# Altium PCB FRONT.PcbDoc (part 1 of 5)
Units mm, origin at the board's own origin, x right, y up, seen from the top; angles counter-clockwise.
Board outline 100 x 68 mm, 4 copper layers (Top Layer, Layer 1, Layer 2, Bottom Layer), stack 1.484 mm thick; 322 components, 276 nets, 1438 pads, 1119 vias.
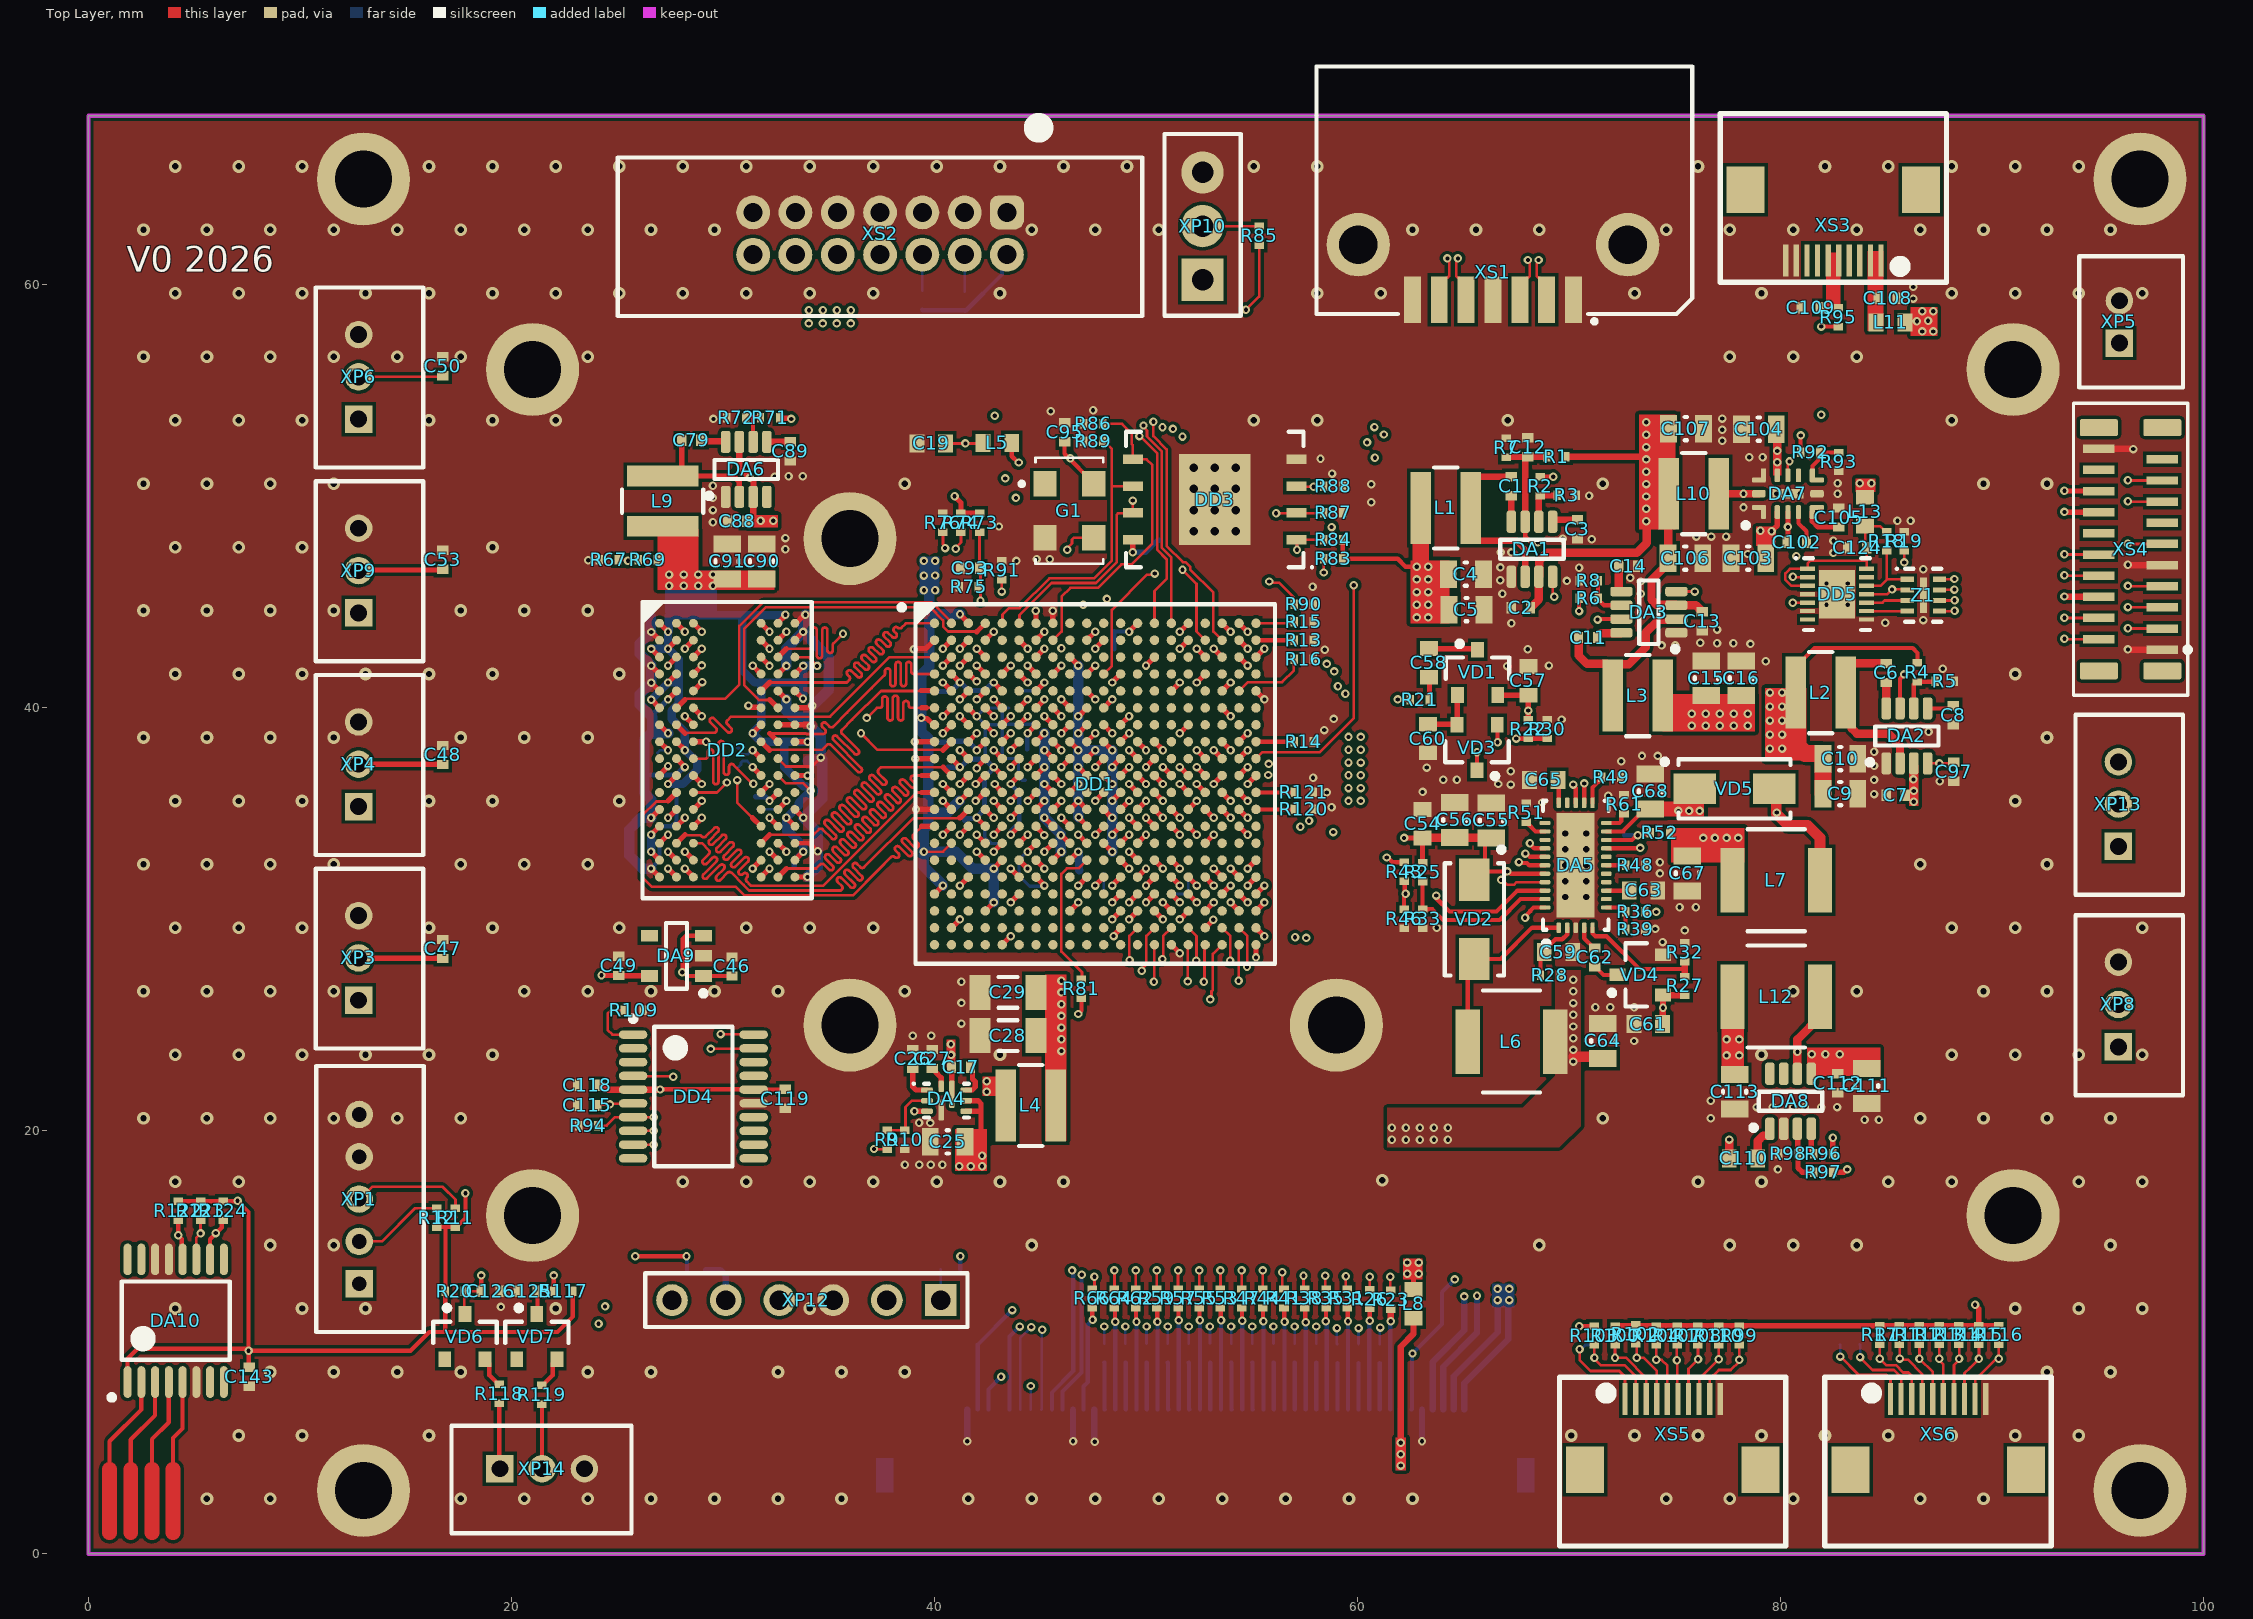
[diagram p0: Top Layer view]
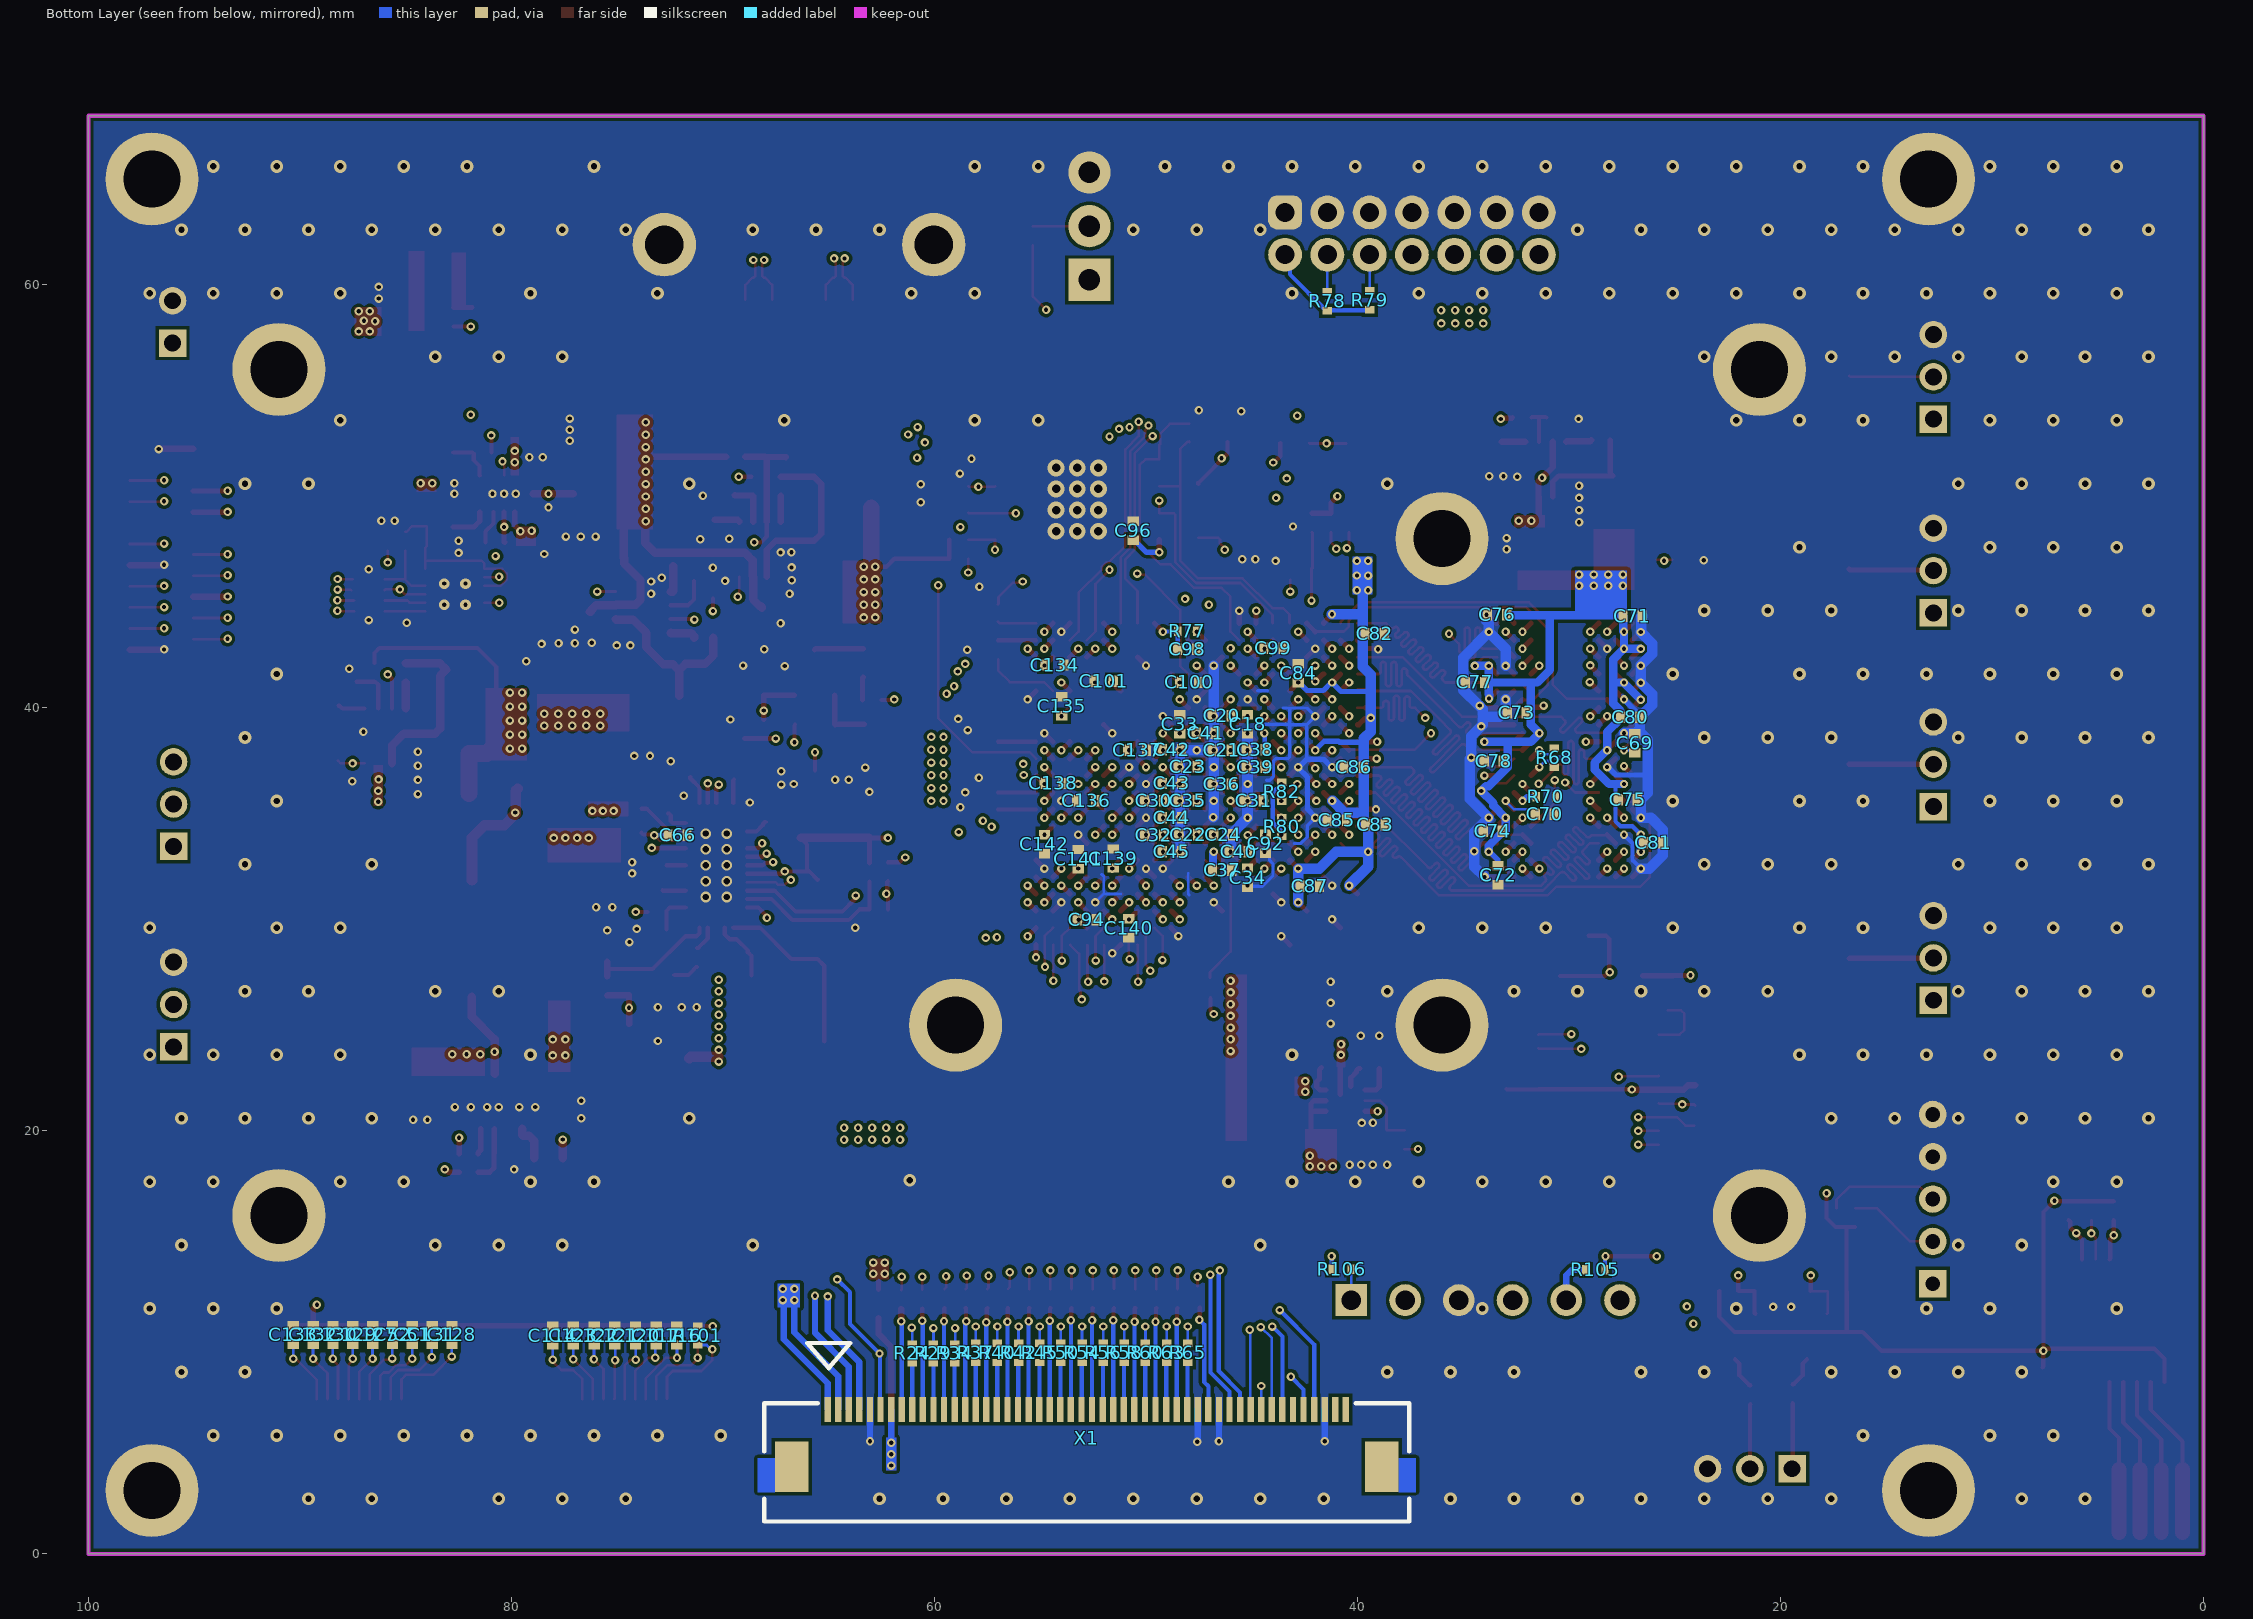
[diagram p1: Bottom Layer view, seen from below]
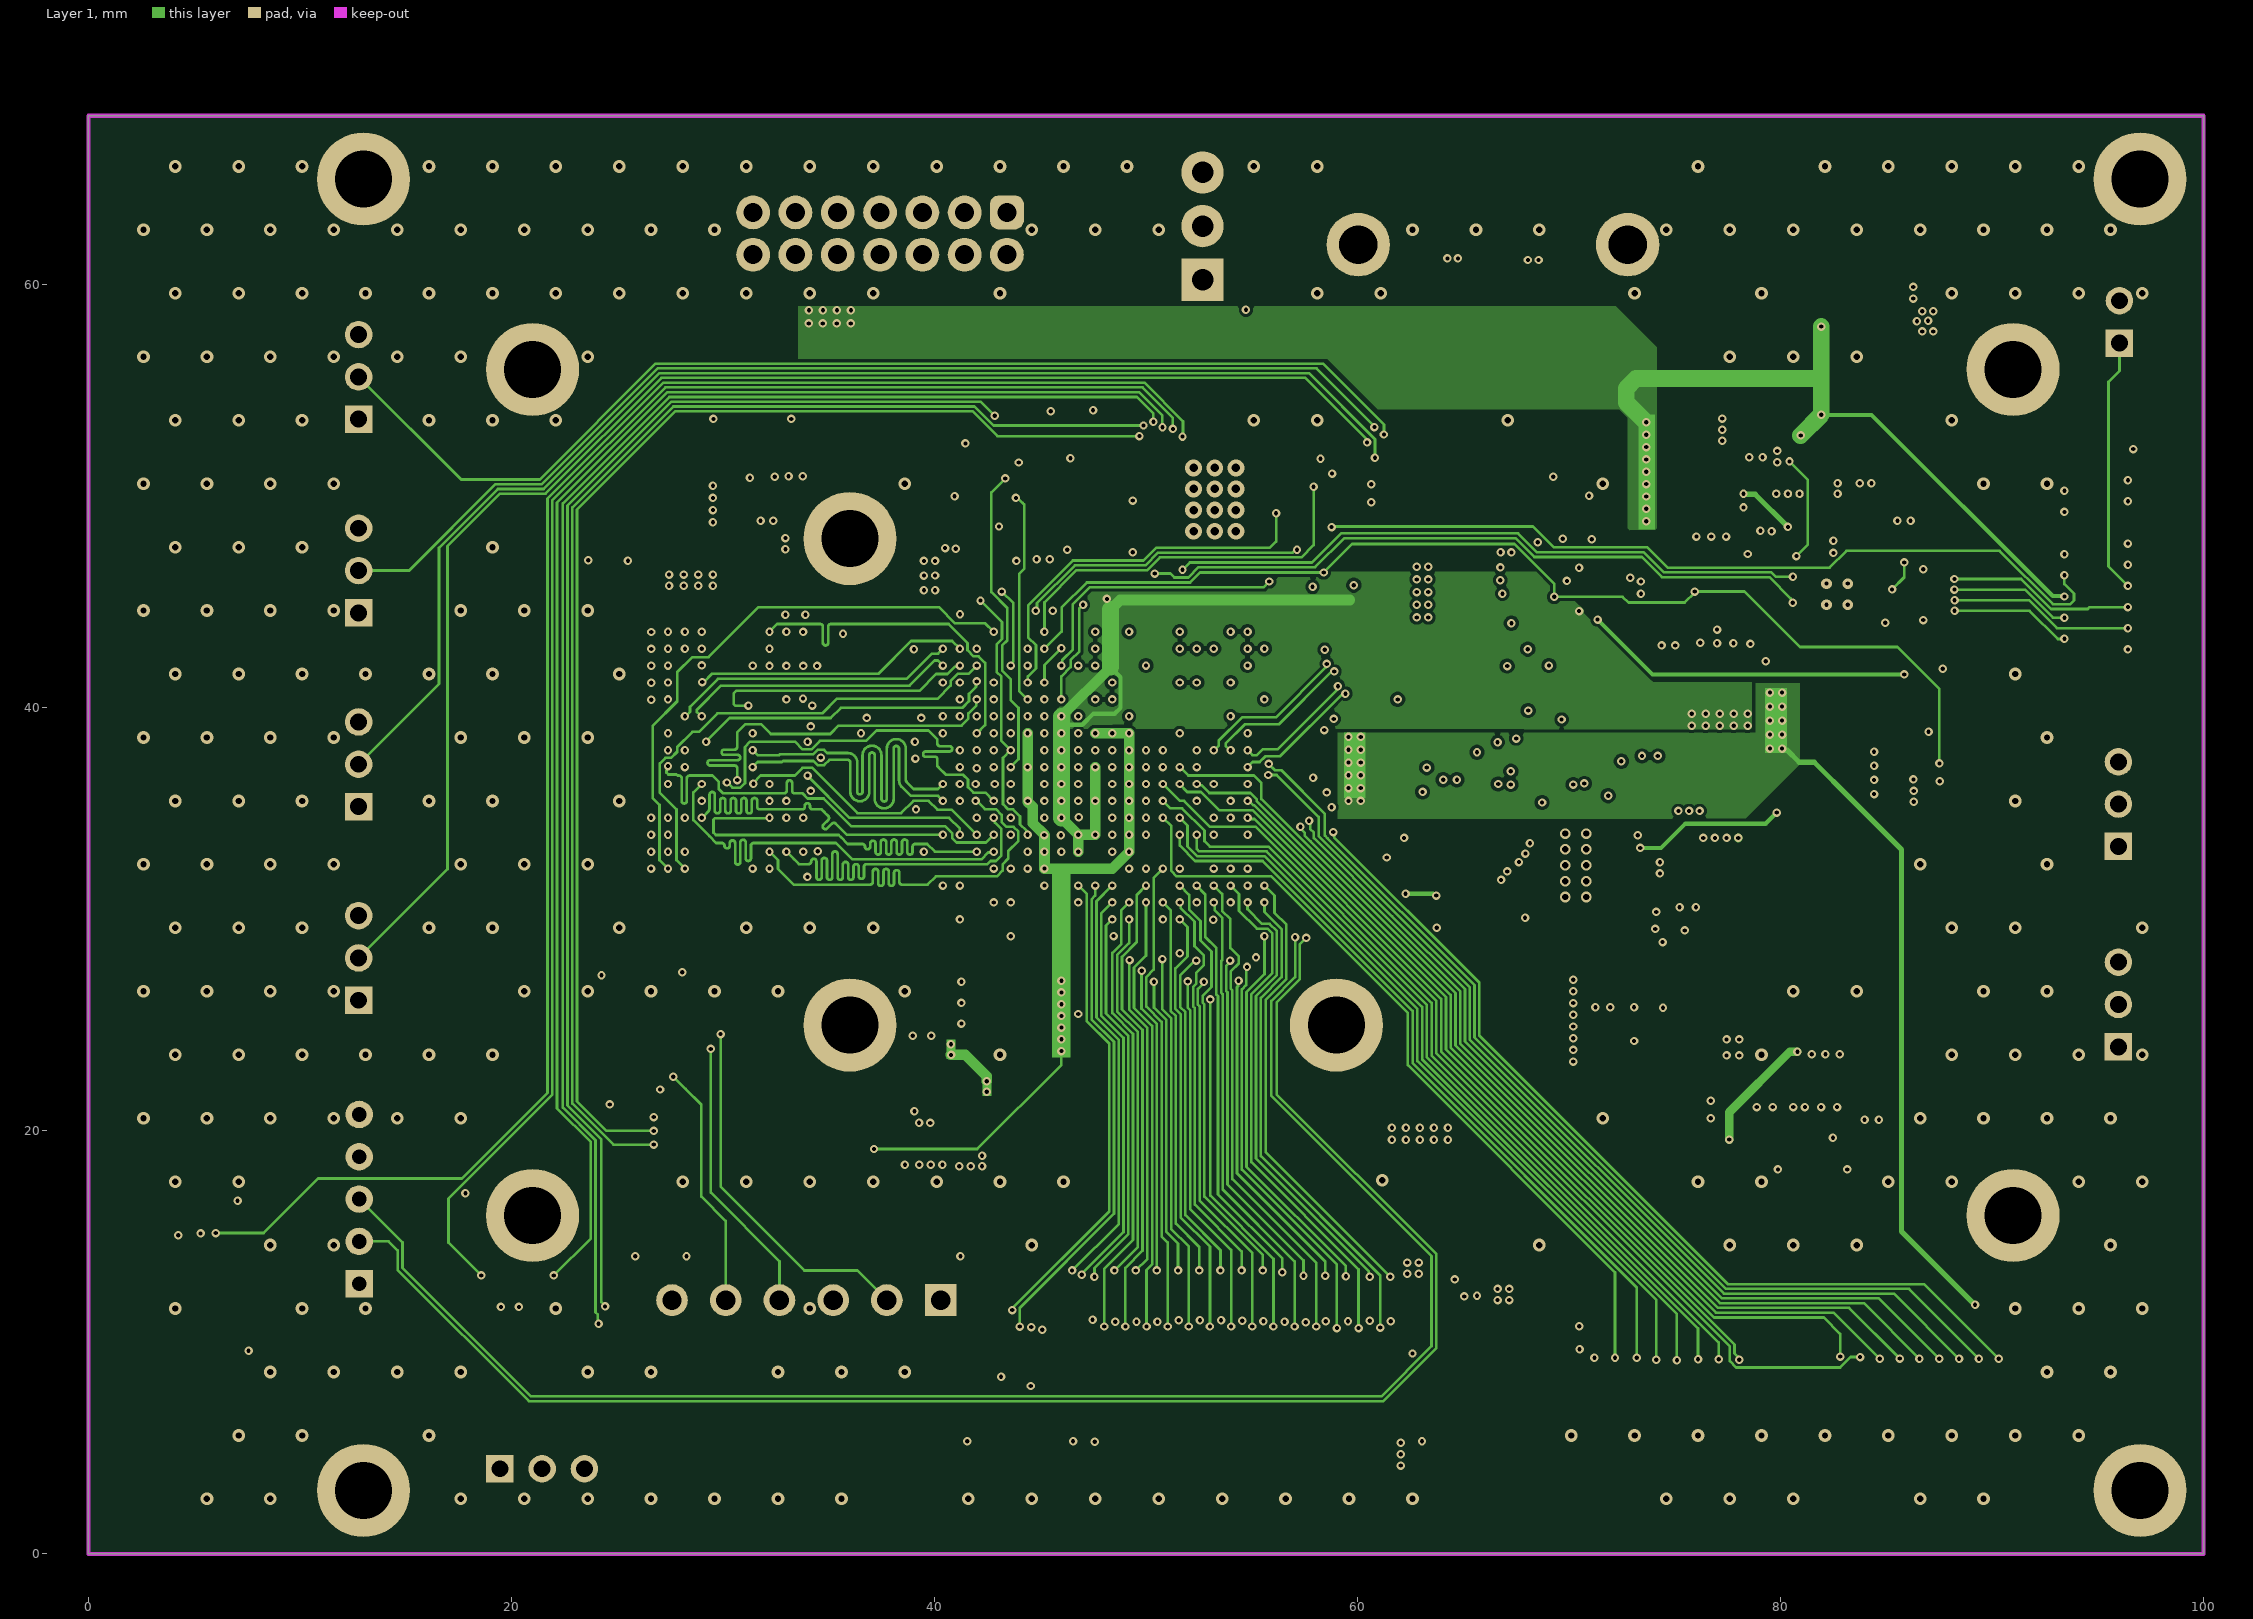
[diagram p2: Layer 1]
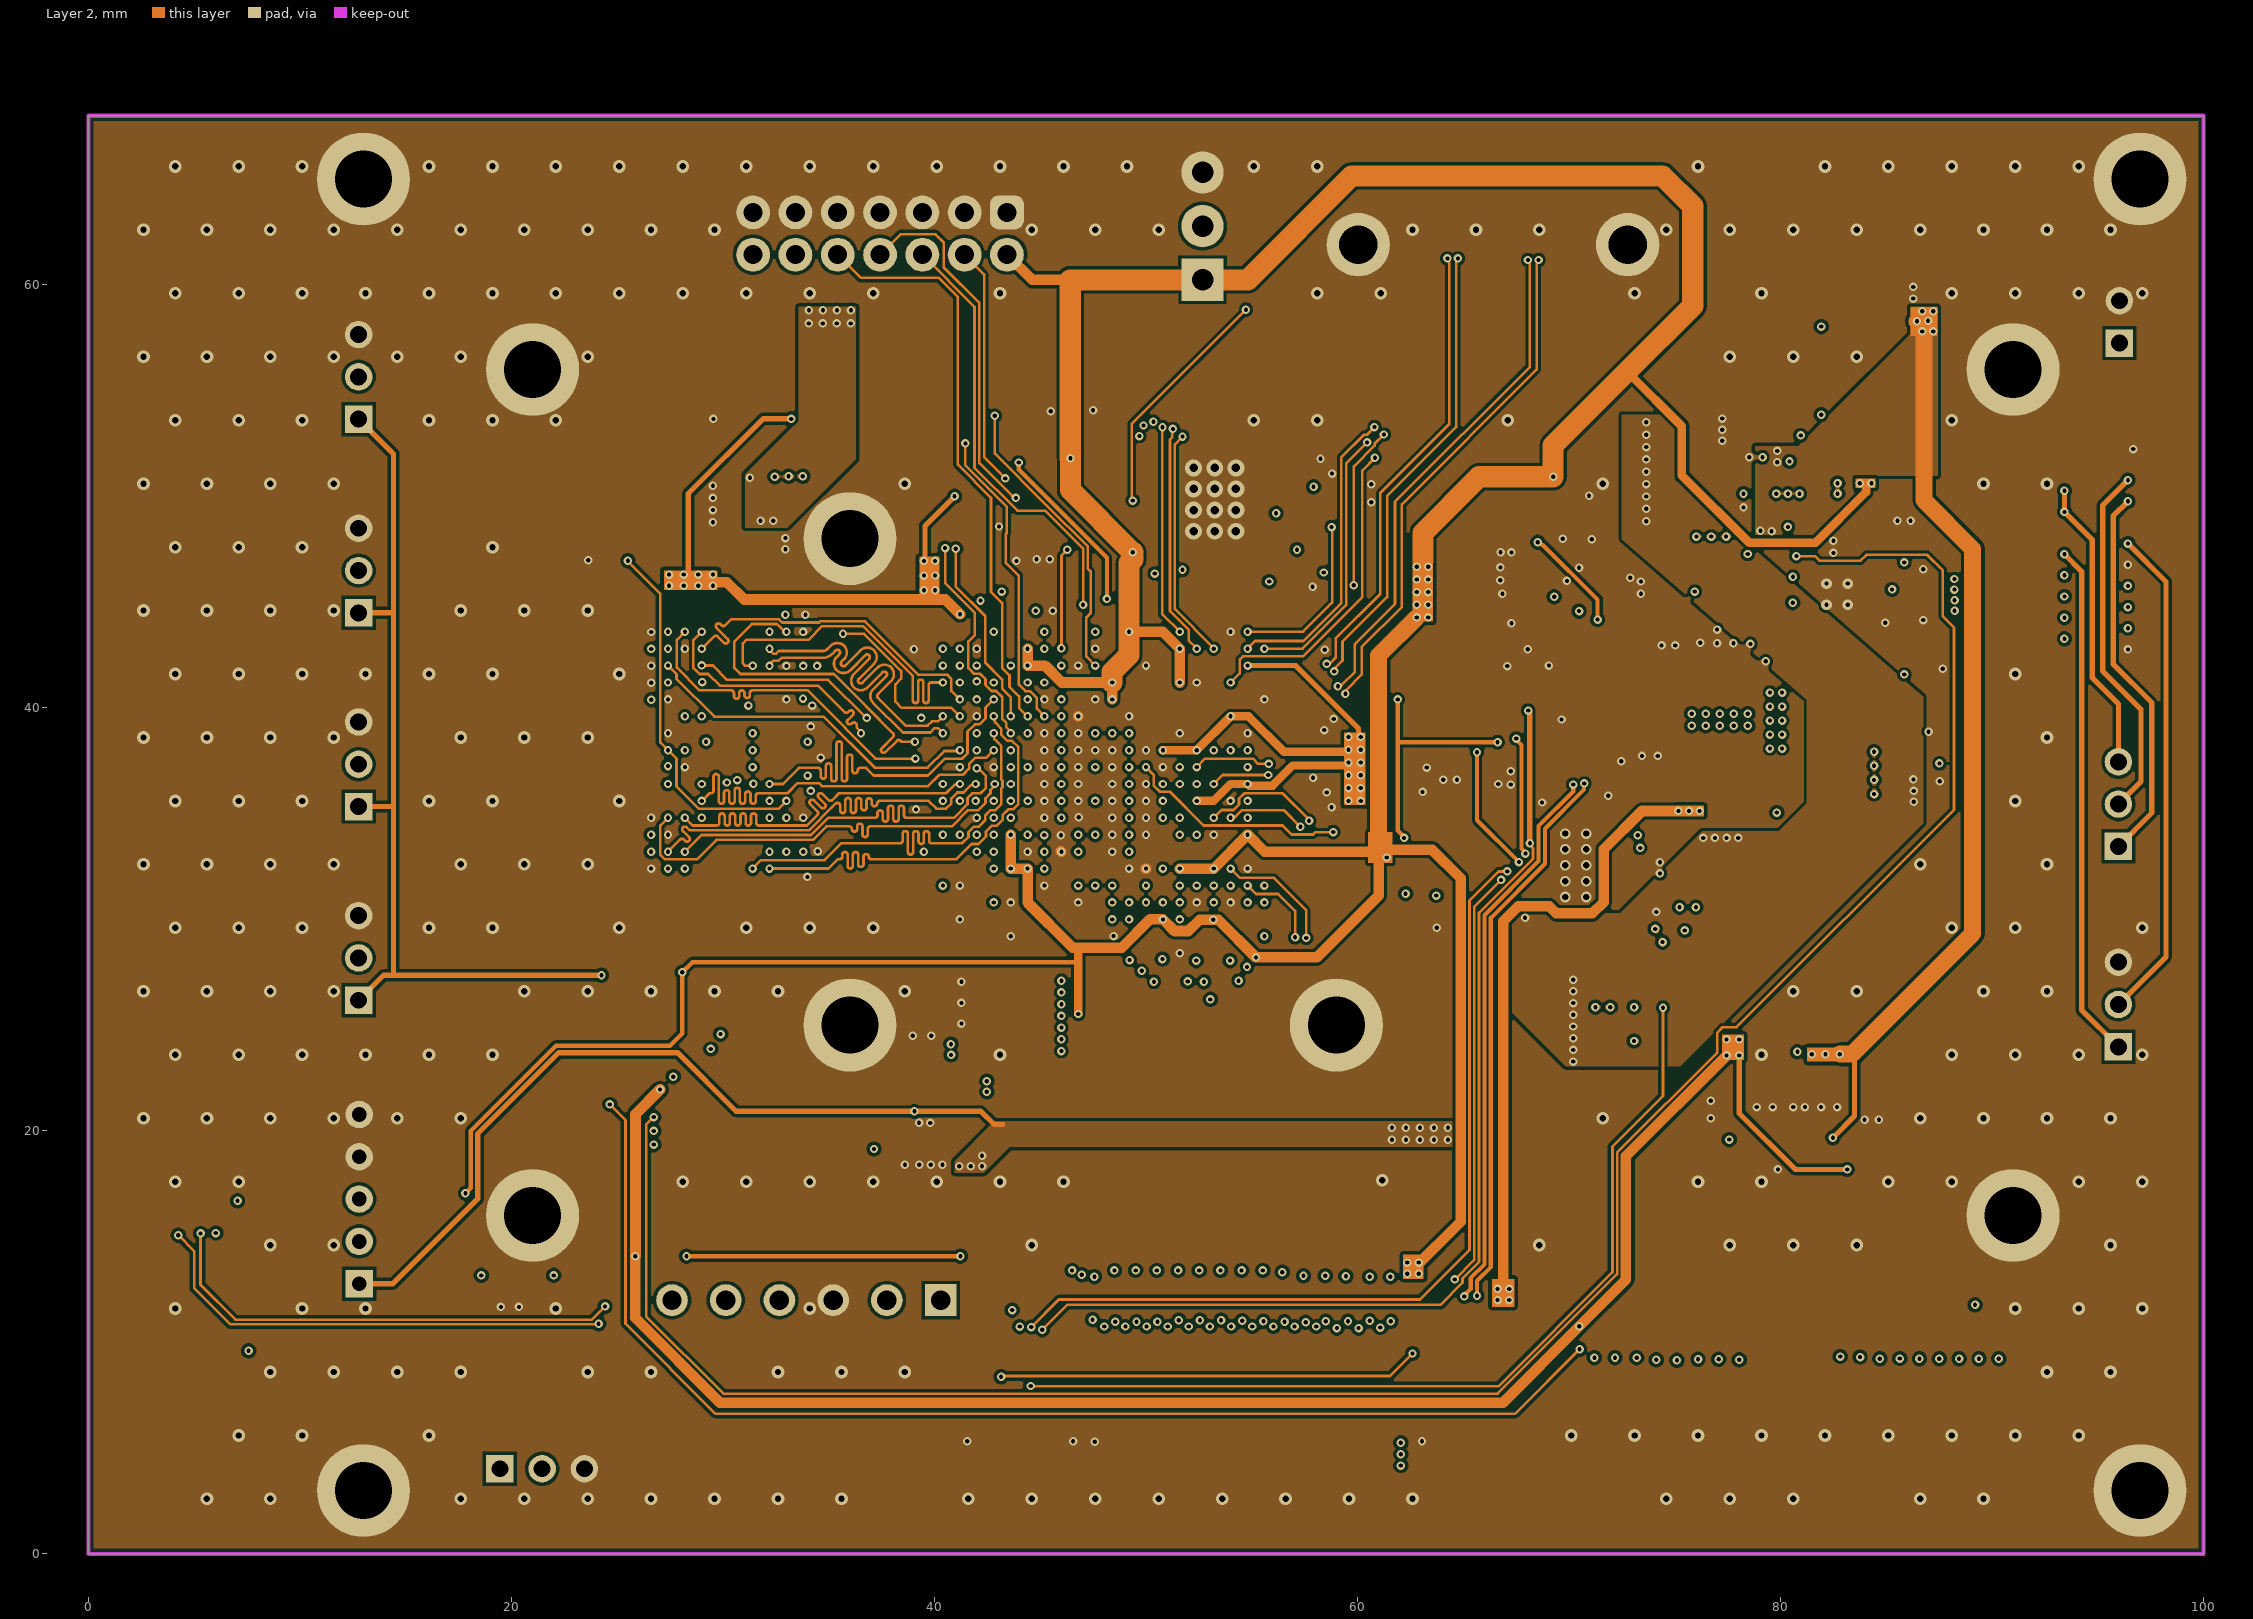
[diagram p3: Layer 2]

## Layer stack, top to bottom
Top Solder: solder mask 0.0102, Solder Resist, Dk 3.5
Top Layer: signal copper 0.0356
Dielectric 2: prepreg 0.0965, PP-013, Dk 4.3
Dielectric 4: core 0.5334, Core-037, Dk 4.8
Layer 1: signal copper 0.018
Dielectric 1: prepreg 0.1168, PP-016, Dk 4.4
Layer 2: signal copper 0.018
Dielectric 5: core 0.5334, Core-037, Dk 4.8
Dielectric 3: prepreg 0.0965, PP-013, Dk 4.3
Bottom Layer: signal copper 0.0356
Bottom Solder: solder mask 0.0102, Solder Resist, Dk 3.5

## Board outline
0,0 100,0 100,68 0,68

## Design rules (kind name [scope] priority, off if disabled: settings)
Clearance [All] p1: gap=0.1 ignorepadtopadclearanceinfootprint=FALSE except(0.15: Arc-Fill Arc-Poly Arc-Region Track-Fill Track-Poly Track-Region SMDPad-Fill SMDPad-Poly SMDPad-Region THPad-Fill THPad-Poly THPad-Region Via-Fill Via-Poly Via-Region Fill-Fill Fill-Poly Fill-Region Poly-Poly Poly-Region Region-Region)
DiffPairsRouting [All] p1: maxlimit=0.254 minlimit=0.2 mostfreqgap=0.2 toplayer_minwidth=0.125 toplayer_maxwidth=0.5 toplayer_prefwidth=0.2 midlayer2_minwidth=0.125 midlayer2_maxwidth=0.5 midlayer2_prefwidth=0.2 midlayer3_minwidth=0.125 midlayer3_maxwidth=0.5 midlayer3_prefwidth=0.2 bottomlayer_minwidth=0.125 bottomlayer_maxwidth=0.5 bottomlayer_prefwidth=0.2 maxuncoupledlength=12.7
HoleSize [All] p1: absolutevalues=TRUE maxlimit=5 minlimit=0.2 maxpercent=80.000 minpercent=20.000
HoleToHoleClearance [All] p1: gap=0.3 allowstackedmicrovias=TRUE
MatchedLengths MatchedLengths_DDR_CLOCKS_STROBES_2 [InxSignalClass('ADDR_PP1') OR InxSignalClass('DATA_BL0') OR InxSignalClass('DATA_BL1')] p1: tolerance=0 checknetsindiffpair=TRUE checkdiffpairvsdiffpair=FALSE checkxsignals=FALSE checkothers=FALSE
MatchedLengths MatchedLengths_DATA_BL1 [InxSignalClass('DATA_BL1')] p2: tolerance=0 checknetsindiffpair=FALSE checkdiffpairvsdiffpair=TRUE checkxsignals=TRUE checkothers=TRUE
MatchedLengths MatchedLengths_DATA_BL0_1 [InxSignalClass('DATA_BL0')] p3: tolerance=0 checknetsindiffpair=FALSE checkdiffpairvsdiffpair=TRUE checkxsignals=TRUE checkothers=TRUE
MatchedLengths MatchedLengths_ADDR_PP1_1 [InxSignalClass('ADDR_PP1')] p4: tolerance=0 checknetsindiffpair=FALSE checkdiffpairvsdiffpair=TRUE checkxsignals=TRUE checkothers=TRUE
MatchedLengths MatchedLengths_DDR_CLOCKS_STROBES_1 [All] p5: tolerance=0 checknetsindiffpair=TRUE checkdiffpairvsdiffpair=FALSE checkxsignals=FALSE checkothers=FALSE
MatchedLengths MatchedLengths_DDR_CLOCKS_STROBES [InxSignalClass('ADDR_PP1') OR InxSignalClass('DATA_BL0')] p6: tolerance=3 checknetsindiffpair=TRUE checkdiffpairvsdiffpair=FALSE checkxsignals=FALSE checkothers=FALSE
MatchedLengths MatchedLengths_DATA_BL0 [InxSignalClass('DATA_BL0')] p7: tolerance=3 checknetsindiffpair=FALSE checkdiffpairvsdiffpair=TRUE checkxsignals=TRUE checkothers=TRUE targetsourcename=DDR_D6_BL0
MatchedLengths MatchedLengths_ADDR_PP1 [InxSignalClass('ADDR_PP1')] p8: tolerance=3 checknetsindiffpair=FALSE checkdiffpairvsdiffpair=TRUE checkxsignals=TRUE checkothers=TRUE
MinimumSolderMaskSliver [All] p1: minsoldermaskwidth=0.125
PolygonConnect [All] p1: connectstyle=Direct reliefconductorwidth=0.254 reliefentries=4 polygonreliefangle="90 Angle" airgapwidth=0.254
RoutingTopology RoutingTopology_DDRAddressAndControls [InNetClass('DDR_AddressAndControls')] p1: topology=Daisy_Simple
RoutingTopology [All] p2: topology=Shortest
RoutingVias [All] p1: holewidth=0.4 width=0.7 viastyle="Through Hole" minholewidth=0.2 minwidth=0.4 maxholewidth=5 maxwidth=10
SolderMaskExpansion [All] p1: expansion=0.102 istentingtop=FALSE
SupplyNets "Schematic Supply Nets_15" [InNet('TCH_IRQ')] p1: voltage=0.000
SupplyNets "Schematic Supply Nets_13" [InNet('I2C_SCL')] p2: voltage=0.000
SupplyNets "Schematic Supply Nets_12" [InNet('I2C_SDA')] p3: voltage=0.000
SupplyNets "Schematic Supply Nets_11" [InNet('ADC_BAND0N')] p4: voltage=0.000
SupplyNets "Schematic Supply Nets_10" [InNet('ADC_BAND1N')] p5: voltage=0.000
SupplyNets "Schematic Supply Nets_2" [InNet('MCU_GP0')] p6: voltage=0.000
SupplyNets "Schematic Supply Nets_1" [InNet('MCU_GP1')] p7: voltage=0.000
SupplyNets "Schematic Supply Nets" [InNet('CW_DOT')] p8: voltage=0.000
SupplyNets "Schematic Supply Nets_9" [InNet('CW_DASH')] p9: voltage=0.000
SupplyNets "Schematic Supply Nets_7" [InNet('CW_KEY')] p10: voltage=0.000
SupplyNets "Schematic Supply Nets_6" [InNet('RS422TX')] p11: voltage=0.000
SupplyNets "Schematic Supply Nets_4" [InNet('RS422RX')] p12: voltage=0.000
SupplyNets "Schematic Supply Nets_120" [InNet('VDD_1V25')] p13: voltage=0.000
SupplyNets "Schematic Supply Nets_119" [InNet('BL_K2')] p14: voltage=0.000
SupplyNets "Schematic Supply Nets_118" [InNet('LCD_AVDD')] p15: voltage=0.000
SupplyNets "Schematic Supply Nets_117" [InNet('DDR_1V35')] p16: voltage=0.000
SupplyNets "Schematic Supply Nets_116" [InNet('LCD_OPI')] p17: voltage=0.000
SupplyNets "Schematic Supply Nets_115" [InNet('PWR_KEY0')] p18: voltage=0.000
SupplyNets "Schematic Supply Nets_114" [InNet('LCD_DVDD')] p19: voltage=0.000
SupplyNets "Schematic Supply Nets_112" [InNet('MCU_3V3')] p20: voltage=0.000
SupplyNets "Schematic Supply Nets_111" [InNet('LCD_VGH')] p21: voltage=0.000
SupplyNets "Schematic Supply Nets_110" [InNet('BL_PWR')] p22: voltage=0.000
SupplyNets "Schematic Supply Nets_109" [InNet('ADC2_N')] p23: voltage=0.000
SupplyNets "Schematic Supply Nets_108" [InNet('ADC1_N')] p24: voltage=0.000
SupplyNets "Schematic Supply Nets_107" [InNet('BL_K1')] p25: voltage=0.000
SupplyNets "Schematic Supply Nets_106" [InNet('LCD_VCOM')] p26: voltage=0.000
SupplyNets "Schematic Supply Nets_105" [InNet('BL_A')] p27: voltage=0.000
SupplyNets "Schematic Supply Nets_104" [InNet('ADC0_N')] p28: voltage=0.000
SupplyNets "Schematic Supply Nets_103" [InNet('PWR_KEY1')] p29: voltage=0.000
SupplyNets "Schematic Supply Nets_102" [InNet('ADC3_N')] p30: voltage=0.000
SupplyNets "Schematic Supply Nets_101" [InNet('LCD_VGL')] p31: voltage=0.000
SupplyNets "Schematic Supply Nets_100" [InNet('POR_B')] p32: voltage=0.000
SupplyNets "Schematic Supply Nets_98" [InNet('LCD_DCTRL')] p33: voltage=0.000
SupplyNets "Schematic Supply Nets_53" [InNet('LCD_EN')] p34: voltage=0.000
SupplyNets "Schematic Supply Nets_79" [InNet('MIO2')] p35: voltage=0.000
SupplyNets "Schematic Supply Nets_74" [InNet('PWR_EN')] p36: voltage=0.000
SupplyNets "Schematic Supply Nets_64" [InNet('VDD_2V5')] p37: voltage=0.000
SupplyNets "Schematic Supply Nets_63" [InNet('GND')] p38: voltage=0.000
SupplyNets "Schematic Supply Nets_43" [InNet('VMODE0')] p39: voltage=0.000
SupplyNets "Schematic Supply Nets_42" [InNet('MIO5')] p40: voltage=0.000
SupplyNets "Schematic Supply Nets_36" [InNet('MIO3')] p41: voltage=0.000
SupplyNets "Schematic Supply Nets_34" [InNet('MIO4')] p42: voltage=0.000
SupplyNets "Schematic Supply Nets_20" [InNet('MIO6')] p43: voltage=0.000
SupplyNets "Schematic Supply Nets_14" [InNet('VDD_3V3')] p44: voltage=0.000
SupplyNets "Schematic Supply Nets_8" [InNet('VDD_1V0')] p45: voltage=0.000
SupplyNets "Schematic Supply Nets_5" [InNet('VDD_1V8')] p46: voltage=0.000
SupplyNets "Schematic Supply Nets_3" [InNet('VMODE1')] p47: voltage=0.000
Width [All] p1: maxlimit=5 minlimit=0.125 preferedwidth=0.2 minimp=50.000000 maximp=50.000000 favimp=50.000000
25 further rules are at their usual default settings.

## Classes and differential pairs
component class FRONT_INTF: C46 C49 C51 C52 C114 C116 C117 C120 C121 C122 C123 C124 C125 C126 C127 C128 C129 C130 C131 C132 C133 DA9 DD5 L13 R17 R18 R19 R20 R99 R100 R102 R104 R107 R108 R110 R111 R112 R113 R114 R115 R116 R117 R118 R119 VD6 VD7 XP5 XP8 XP13 XP14 XS4 XS5 XS6 Z1
component class FRONT_PWR: C1 C2 C3 C4 C5 C6 C7 C8 C9 C10 C11 C12 C13 C14 C15 C16 C17 C18 C19 C20 C21 C22 C23 C24 C25 C26 C27 C28 C29 C30 C31 C32 C33 C34 C35 C36 C37 C38 C39 C40 C41 C42 C43 C44 C45 DA1 DA2 DA3 DA4 L1 L2 L3 L4 L5 R1 R2 R3 R4 R5 R6 R7 R8 R9 R10
component class FRONT_PS: C94 C95 C96 C97 C98 C99 C100 C101 C143 DA10 DD1 DD3 G1 R77 R78 R79 R80 R81 R82 R83 R84 R85 R86 R87 R88 R89 R90 R91 R122 R123 R124 XP10 XS2
component class FRONT_PL: C47 C48 C50 C53 C134 C135 C136 C137 C138 C139 C140 C141 C142 R11 R12 R13 R14 R15 R16 R120 R121 XP1 XP3 XP4 XP6 XP9 XS1
component class FRONT_MCU: C102 C103 C104 C105 C106 C107 C108 C109 C110 C111 C112 C113 C115 C118 C119 DA7 DA8 DD4 L10 L11 L12 R92 R93 R94 R95 R96 R97 R98 R101 R103 R105 R106 R109 XP12 XS3
component class FRONT_LCD: C54 C55 C56 C57 C58 C59 C60 C61 C62 C63 C64 C65 C66 C67 C68 DA5 L6 L7 L8 R21 R22 R23 R24 R25 R26 R27 R28 R29 R30 R31 R32 R33 R34 R35 R36 R37 R38 R39 R40 R41 R42 R43 R44 R45 R46 R47 R48 R49 R50 R51 R52 R53 R54 R55 R56 R57 R58 R59 R60 R61 R62 R63 R64 R65 R66 VD1 VD2 VD3 VD4 VD5 X1
component class FRONT_DDR: C69 C70 C71 C72 C73 C74 C75 C76 C77 C78 C79 C80 C81 C82 C83 C84 C85 C86 C87 C88 C89 C90 C91 C92 C93 DA6 DD2 L9 R67 R68 R69 R70 R71 R72 R73 R74 R75 R76
differential pair MIC: +MIC_P -MIC_N
differential pair DDR_DQS1: +DDR_DQS1_P -DDR_DQS1_N
differential pair DDR_DQS0: +DDR_DQS0_P -DDR_DQS0_N
differential pair DDR_CK: +DDR_CK_P -DDR_CK_N
differential pair SERDATA: +SERDATA_P -SERDATA_N
differential pair SERCLK: +SERCLK_P -SERCLK_N

## Components (designator, comment, footprint, x,y, rotation, side; value= is the part's Value field where it differs from the comment)
C1 "CC0402KRX5R6BB104" CAPC1005X05L 67.275,50.475 r90 top value="0402 0,1 мкФ 10В X7R"
C2 "CC0402KRX5R6BB104" CAPC1005X05L 67.725,44.725 r0 top value="0402 0,1 мкФ 10В X7R"
C3 "CC0402KRX7R9BB822" CAPC1005X05L 70.4,48.45 r90 top value="0402 8,2 нФ 50В X7R"
C4 "CC0805MKX5R5BB226" CAPC2012X09L 65.125,46.325 r180 top value="0805 22 мкФ 6,3В X5R"
C5 "CC0805MKX5R5BB226" CAPC2012X09L 65.15,44.65 r180 top value="0805 22 мкФ 6,3В X5R"
C6 "CC0402KRX5R6BB104" CAPC1005X05L 85,41.65 r90 top value="0402 0,1 мкФ 10В X7R"
C7 "CC0402KRX5R6BB104" CAPC1005X05L 85.45,35.875 r0 top value="0402 0,1 мкФ 10В X7R"
C8 "CC0402KRX7R9BB822" CAPC1005X05L 88.175,39.65 r90 top value="0402 8,2 нФ 50В X7R"
C9 "CC0805MKX5R5BB226" CAPC2012X09L 82.825,35.95 r180 top value="0805 22 мкФ 6,3В X5R"
C10 "CC0805MKX5R5BB226" CAPC2012X09L 82.825,37.6 r180 top value="0805 22 мкФ 6,3В X5R"
C11 "CC0402KRX5R6BB104" CAPC1005X05L 70.9,43.325 r180 top value="0402 0,1 мкФ 10В X7R"
C12 "CC0402KRX5R6BB104" CAPC1005X05L 68.05,52.325 r270 top value="0402 0,1 мкФ 10В X7R"
C13 "CC0402KRX5R6BB104" CAPC1005X05L 76.3,44.1 r90 top value="0402 0,1 мкФ 10В X7R"
C14 "CC0402KRX7R9BB822" CAPC1005X05L 72.8,46.7 r180 top value="0402 8,2 нФ 50В X7R"
C15 "CC0805MKX5R5BB226" CAPC2012X09L 76.5,41.4 r270 top value="0805 22 мкФ 6,3В X5R"
C16 "CC0805MKX5R5BB226" CAPC2012X09L 78.15,41.4 r270 top value="0805 22 мкФ 6,3В X5R"
C17 "CC0402KRX5R6BB104" CAPC1005X05L 41.25,23 r180 top value="0402 0,1 мкФ 10В X7R"
C18 "CC0402KRX5R6BB104" CAPC1005X05L 45.2,39.225 r270 bottom value="0402 0,1 мкФ 10В X7R"
C19 "CC0603KRX5R6BB475" CAPC1608X08L 39.85,52.5 r0 top value="0603 4,7 мкФ 10В X5R"
C20 "CC0402KRX5R6BB104" CAPC1005X05L 46.425,39.625 r0 bottom value="0402 0,1 мкФ 10В X7R"
C21 "CC0402KRX5R6BB104" CAPC1005X05L 46.425,38 r0 bottom value="0402 0,1 мкФ 10В X7R"
C22 "CC0402KRX5R6BB104" CAPC1005X05L 48,34 r0 bottom value="0402 0,1 мкФ 10В X7R"
C23 "CC0402KRX5R6BB104" CAPC1005X05L 48.025,37.225 r0 bottom value="0402 0,1 мкФ 10В X7R"
C24 "CC0402KRX5R6BB104" CAPC1005X05L 46.35,34 r180 bottom value="0402 0,1 мкФ 10В X7R"
C25 "CC0805KKX5R8BB106" CAPC2012X09L 40.625,19.475 r0 top value="0805 10 мкФ 25В X7R"
C26 "CC0402KRX5R5BB105" CAPC1005X05L 38.975,23.4 r270 top value="0402 1 мкФ 6,3В X5R"
C27 "CC0402KRX7R9BB103" CAPC1005X05L 39.9,23.4 r270 top value="0402 10 нФ 50В X7R"
C28 "CC1206MKX5R5BB107" CAPC3216X12L 43.475,24.5 r0 top value="1206 100 мкФ 6,3В X5R"
C29 "CC1206MKX5R5BB107" CAPC3216X12L 43.475,26.55 r0 top value="1206 100 мкФ 6,3В X5R"
C30 "CC0402KRX5R6BB104" CAPC1005X05L 49.625,35.6 r0 bottom value="0402 0,1 мкФ 10В X7R"
C31 "CC0402KRX5R6BB104" CAPC1005X05L 44.9,35.6 r0 bottom value="0402 0,1 мкФ 10В X7R"
C32 "CC0402KRX5R6BB104" CAPC1005X05L 49.625,33.975 r0 bottom value="0402 0,1 мкФ 10В X7R"
C33 "CC0402KRX5R6BB104" CAPC1005X05L 48.4,39.225 r90 bottom value="0402 0,1 мкФ 10В X7R"
C34 "CC0402KRX5R6BB104" CAPC1005X05L 45.2,31.975 r270 bottom value="0402 0,1 мкФ 10В X7R"
C35 "CC0402KRX5R6BB104" CAPC1005X05L 48.025,35.6 r0 bottom value="0402 0,1 мкФ 10В X7R"
C36 "CC0402KRX5R6BB104" CAPC1005X05L 46.425,36.4 r0 bottom value="0402 0,1 мкФ 10В X7R"
C37 "CC0402KRX5R6BB104" CAPC1005X05L 46.402,32.33 r180 bottom value="0402 0,1 мкФ 10В X7R"
C38 "CC0402KRX5R6BB104" CAPC1005X05L 44.825,38.025 r0 bottom value="0402 0,1 мкФ 10В X7R"
C39 "CC0402KRX5R6BB104" CAPC1005X05L 44.825,37.2 r0 bottom value="0402 0,1 мкФ 10В X7R"
C40 "CC0402KRX5R6BB104" CAPC1005X05L 45.625,33.2 r0 bottom value="0402 0,1 мкФ 10В X7R"
C41 "CC0402KRX5R6BB104" CAPC1005X05L 47.175,38.8 r180 bottom value="0402 0,1 мкФ 10В X7R"
C42 "CC0402KRX5R6BB104" CAPC1005X05L 48.775,38.025 r180 bottom value="0402 0,1 мкФ 10В X7R"
C43 "CC0402KRX5R6BB104" CAPC1005X05L 48.775,36.425 r180 bottom value="0402 0,1 мкФ 10В X7R"
C44 "CC0402KRX5R6BB104" CAPC1005X05L 48.775,34.8 r180 bottom value="0402 0,1 мкФ 10В X7R"
C45 "CC0402KRX5R6BB104" CAPC1005X05L 48.775,33.2 r180 bottom value="0402 0,1 мкФ 10В X7R"
C46 "CC0402KRX5R6BB104" CAPC1005X05L 30.425,27.775 r270 top value="0402 0,1 мкФ 10В X7R"
C47 "CC0402KRX5R6BB104" CAPC1005X05L 16.75,28.6 r270 top value="0402 0,1 мкФ 10В X7R"
C48 "CC0402KRX5R6BB104" CAPC1005X05L 16.75,37.775 r270 top value="0402 0,1 мкФ 10В X7R"
C49 "CC0402KRX5R6BB104" CAPC1005X05L 25.075,27.8 r270 top value="0402 0,1 мкФ 10В X7R"
C50 "CC0402KRX5R6BB104" CAPC1005X05L 16.75,56.15 r270 top value="0402 0,1 мкФ 10В X7R"
C51 "CC0402KRX5R6BB104" CAPC1005X05L 84.688,10.35 r90 bottom value="0402 0,1 мкФ 10В X7R"
C52 "CC0402KRX5R6BB104" CAPC1005X05L 85.625,10.35 r90 bottom value="0402 0,1 мкФ 10В X7R"
C53 "CC0402KRX5R6BB104" CAPC1005X05L 16.75,47 r270 top value="0402 0,1 мкФ 10В X7R"
C54 "CC0603KRX7R9BB105" CAPC1608X08L 63.075,34.525 r270 top value="0603 1 мкФ 50В X7R"
C55 "CC0805KKX5R8BB106" CAPC2012X09L 66.325,34.675 r90 top value="0805 10 мкФ 25В X7R"
C56 "CC0805KKX5R8BB106" CAPC2012X09L 64.6,34.7 r90 top value="0805 10 мкФ 25В X7R"
C57 "CC0603KRX7R9BB105" CAPC1608X08L 68.075,41.275 r270 top value="0603 1 мкФ 50В X7R"
C58 "CC0603KRX7R9BB103" CAPC1608X08L 63.375,42.125 r90 top value="0603 0,1 мкФ 50В X7R"
C59 "CC0603KRX7R9BB105" CAPC1608X08L 69.5,28.45 r180 top value="0603 1 мкФ 50В X7R"
C60 "CC0603KRX7R9BB103" CAPC1608X08L 63.325,38.55 r270 top value="0603 0,1 мкФ 50В X7R"
C61 "CC0603KRX7R9BB105" CAPC1608X08L 73.75,25.05 r0 top value="0603 1 мкФ 50В X7R"
C62 "CC0402KRX5R6BB104" CAPC1005X05L 71.225,28.2 r270 top value="0402 0,1 мкФ 10В X7R"
C63 "CC0603KRX7R9BB105" CAPC1608X08L 73.525,31.375 r180 top value="0603 1 мкФ 50В X7R"
C64 "CC0805KKX5R8BB106" CAPC2012X09L 71.6,24.25 r90 top value="0805 10 мкФ 25В X7R"
C65 "CC0603KRX7R9BB103" CAPC1608X08L 68.8,36.6 r0 top value="0603 0,1 мкФ 50В X7R"
C66 "CC0402KRX5R6BB104" CAPC1005X05L 72.15,33.975 r0 bottom value="0402 0,1 мкФ 10В X7R"
C67 "CC0805KKX7R8BB475" CAPC2012X09L 75.6,32.175 r90 top value="0805 4,7 мкФ 25В X7R"
C68 "CC0805KKX7R8BB475" CAPC2012X09L 73.85,36.05 r270 top value="0805 4,7 мкФ 25В X7R"
C69 "CC0402KRX5R6BB104" CAPC1005X05L 26.896,38.322 r270 bottom value="0402 0,1 мкФ 10В X7R"
C70 "CC0402KRX5R6BB104" CAPC1005X05L 31.146,34.961 r0 bottom value="0402 0,1 мкФ 10В X7R"
C71 "CC0402KRX5R6BB104" CAPC1005X05L 26.999,44.326 r0 bottom value="0402 0,1 мкФ 10В X7R"
C72 "CC0402KRX5R6BB104" CAPC1005X05L 33.356,32.082 r90 bottom value="0402 0,1 мкФ 10В X7R"
C73 "CC0402KRX5R6BB104" CAPC1005X05L 32.475,39.775 r180 bottom value="0402 0,1 мкФ 10В X7R"
C74 "CC0402KRX5R6BB104" CAPC1005X05L 33.6,34.175 r180 bottom value="0402 0,1 мкФ 10В X7R"
C75 "CC0402KRX5R6BB104" CAPC1005X05L 27.229,35.664 r0 bottom value="0402 0,1 мкФ 10В X7R"
C76 "CC0402KRX5R6BB104" CAPC1005X05L 33.4,44.4 r180 bottom value="0402 0,1 мкФ 10В X7R"
C77 "CC0402KRX5R6BB104" CAPC1005X05L 34.45,41.2 r180 bottom value="0402 0,1 мкФ 10В X7R"
C78 "CC0402KRX5R6BB104" CAPC1005X05L 33.555,37.487 r180 bottom value="0402 0,1 мкФ 10В X7R"
C79 "CC0402KRX5R6BB104" CAPC1005X05L 28.5,52.65 r180 top value="0402 0,1 мкФ 10В X7R"
C80 "CC0402KRX5R6BB104" CAPC1005X05L 27.11,39.549 r0 bottom value="0402 0,1 мкФ 10В X7R"
C81 "CC0402KRX5R6BB104" CAPC1005X05L 26.019,33.613 r0 bottom value="0402 0,1 мкФ 10В X7R"
C82 "CC0402KRX5R6BB104" CAPC1005X05L 39.185,43.504 r0 bottom value="0402 0,1 мкФ 10В X7R"
C83 "CC0402KRX5R6BB104" CAPC1005X05L 39.153,34.467 r0 bottom value="0402 0,1 мкФ 10В X7R"
C84 "CC0402KRX5R6BB104" CAPC1005X05L 42.796,41.634 r270 bottom value="0402 0,1 мкФ 10В X7R"
C85 "CC0402KRX5R6BB104" CAPC1005X05L 40.975,34.687 r180 bottom value="0402 0,1 мкФ 10В X7R"
C86 "CC0402KRX5R6BB104" CAPC1005X05L 40.184,37.185 r180 bottom value="0402 0,1 мкФ 10В X7R"
C87 "CC0402KRX5R6BB104" CAPC1005X05L 42.25,31.575 r0 bottom value="0402 0,1 мкФ 10В X7R"
C88 "CC0402KRX5R6BB104" CAPC1005X05L 30.675,48.825 r0 top value="0402 0,1 мкФ 10В X7R"
C89 "CC0402KRX7R9BB822" CAPC1005X05L 33.175,52.125 r90 top value="0402 8,2 нФ 50В X7R"
C90 "CC0805MKX5R5BB226" CAPC2012X09L 31.825,46.925 r270 top value="0805 22 мкФ 6,3В X5R"
C91 "CC0805MKX5R5BB226" CAPC2012X09L 30.2,46.925 r270 top value="0805 22 мкФ 6,3В X5R"
C92 "CC0402KRX5R6BB104" CAPC1005X05L 44.35,33.575 r90 bottom value="0402 0,1 мкФ 10В X7R"
C93 "CC0402KRX5R6BB104" CAPC1005X05L 41.675,46.6 r0 top value="0402 0,1 мкФ 10В X7R"
C94 "CC0402KRX5R6BB104" CAPC1005X05L 52.8,29.975 r0 bottom value="0402 0,1 мкФ 10В X7R"
C95 "CC0402KRX5R6BB104" CAPC1005X05L 46.15,53.025 r270 top value="0402 0,1 мкФ 10В X7R"
C96 "CC0402KRX5R6BB104" CAPC1005X05L 50.6,48.375 r270 bottom value="0402 0,1 мкФ 10В X7R"
C97 "CC0402KRX5R6BB104" CAPC1005X05L 88.2,36.975 r90 top value="0402 0,1 мкФ 10В X7R"
C98 "CC0402KRX5R6BB104" CAPC1005X05L 48.05,42.775 r0 bottom value="0402 0,1 мкФ 10В X7R"
C99 "CC0402KRX5R6BB104" CAPC1005X05L 43.975,42.825 r0 bottom value="0402 0,1 мкФ 10В X7R"
C100 "CC0402KRX5R6BB104" CAPC1005X05L 47.95,41.2 r0 bottom value="0402 0,1 мкФ 10В X7R"
C101 "CC0402KRX5R6BB104" CAPC1005X05L 52,41.25 r180 bottom value="0402 0,1 мкФ 10В X7R"
C102 "CC0402KRX5R6BB104" CAPC1005X05L 80.775,47.825 r180 top value="0402 0,1 мкФ 10В X7R"
C103 "CC0805KKX7R9BB105" CAPC2012X09L 78.475,47.075 r0 top value="0805 1 мкФ 50В X7R"
C104 "CC0805KKX7R9BB105" CAPC2012X09L 78.975,53.175 r0 top value="0805 1 мкФ 50В X7R"
C105 "CC0402KRX5R5BB105" CAPC1005X05L 82.75,49 r270 top value="0402 1 мкФ 6,3В X5R"
C106 "CC0805MKX5R5BB226" CAPC2012X09L 75.5,47.075 r180 top value="0805 22 мкФ 6,3В X5R"
C107 "CC0805MKX5R5BB226" CAPC2012X09L 75.525,53.2 r180 top value="0805 22 мкФ 6,3В X5R"
C108 "" CAPC1005X05L 85.075,59.375 r180 top value="0402 1 нФ 50В C0G"
C109 "" CAPC1005X05L 81.425,58.925 r0 top value="0402 1 нФ 50В C0G"
C110 "CC0603KRX7R9BB103" CAPC1608X08L 78.25,18.7 r180 top value="0603 0,1 мкФ 50В X7R"
C111 "CC0805KKX7R9BB105" CAPC2012X09L 84.075,22.125 r270 top value="0805 1 мкФ 50В X7R"
C112 "C0402C102J5GACTU" CAPC1005X05L 82.7,22.25 r270 top value="0402 1 нФ 50В C0G"
C113 "CC0805KKX5R8BB106" CAPC2012X09L 77.825,21.85 r90 top value="0805 10 мкФ 25В X7R"
C114 "CC0402KRX5R6BB104" CAPC1005X05L 78.05,10.325 r90 bottom value="0402 0,1 мкФ 10В X7R"
C115 "CC0402KRX5R6BB104" CAPC1005X05L 23.575,21.2 r0 top value="0402 0,1 мкФ 10В X7R"
C116 "CC0402KRX5R6BB104" CAPC1005X05L 72.179,10.325 r90 bottom value="0402 0,1 мкФ 10В X7R"
C117 "CC0402KRX5R6BB104" CAPC1005X05L 73.157,10.325 r90 bottom value="0402 0,1 мкФ 10В X7R"
C118 "CC0402KRX5R6BB104" CAPC1005X05L 23.575,22.15 r180 top value="0402 0,1 мкФ 10В X7R"
C119 "CC0402KRX5R6BB104" CAPC1005X05L 32.95,21.525 r270 top value="0402 0,1 мкФ 10В X7R"
C120 "CC0402KRX5R6BB104" CAPC1005X05L 74.136,10.325 r90 bottom value="0402 0,1 мкФ 10В X7R"
C121 "CC0402KRX5R6BB104" CAPC1005X05L 75.114,10.325 r90 bottom value="0402 0,1 мкФ 10В X7R"
C122 "CC0402KRX5R6BB104" CAPC1005X05L 76.093,10.325 r90 bottom value="0402 0,1 мкФ 10В X7R"
C123 "CC0402KRX5R6BB104" CAPC1005X05L 77.071,10.325 r90 bottom value="0402 0,1 мкФ 10В X7R"
C124 "CC0402KRX5R6BB104" CAPC1005X05L 83.625,47.575 r0 top value="0402 0,1 мкФ 10В X7R"
C125 "C0402C102J5GACTU" CAPC1005X05L 20.775,12.425 r180 top value="0402 1 нФ 50В C0G"
C126 "C0402C102J5GACTU" CAPC1005X05L 19.025,12.425 r0 top value="0402 1 нФ 50В C0G"
C127 "CC0402KRX5R6BB104" CAPC1005X05L 86.562,10.35 r90 bottom value="0402 0,1 мкФ 10В X7R"
C128 "CC0402KRX5R6BB104" CAPC1005X05L 82.813,10.35 r90 bottom value="0402 0,1 мкФ 10В X7R"
C129 "CC0402KRX5R6BB104" CAPC1005X05L 87.5,10.35 r90 bottom value="0402 0,1 мкФ 10В X7R"
C130 "CC0402KRX5R6BB104" CAPC1005X05L 88.437,10.35 r90 bottom value="0402 0,1 мкФ 10В X7R"
C131 "CC0402KRX5R6BB104" CAPC1005X05L 83.75,10.35 r90 bottom value="0402 0,1 мкФ 10В X7R"
C132 "CC0402KRX5R6BB104" CAPC1005X05L 89.375,10.35 r90 bottom value="0402 0,1 мкФ 10В X7R"
C133 "CC0402KRX5R6BB104" CAPC1005X05L 90.312,10.35 r90 bottom value="0402 0,1 мкФ 10В X7R"
C134 "CC0402KRX5R6BB104" CAPC1005X05L 54.325,42.025 r0 bottom value="0402 0,1 мкФ 10В X7R"
C135 "CC0402KRX5R6BB104" CAPC1005X05L 53.975,40.075 r270 bottom value="0402 0,1 мкФ 10В X7R"
C136 "CC0402KRX5R6BB104" CAPC1005X05L 52.825,35.6 r180 bottom value="0402 0,1 мкФ 10В X7R"
C137 "CC0402KRX5R6BB104" CAPC1005X05L 50.425,38 r0 bottom value="0402 0,1 мкФ 10В X7R"
C138 "CC0402KRX5R6BB104" CAPC1005X05L 54.375,36.425 r0 bottom value="0402 0,1 мкФ 10В X7R"
C139 "CC0402KRX5R6BB104" CAPC1005X05L 51.55,32.875 r270 bottom value="0402 0,1 мкФ 10В X7R"
C140 "CC0402KRX5R6BB104" CAPC1005X05L 50.825,29.575 r90 bottom value="0402 0,1 мкФ 10В X7R"
C141 "CC0402KRX5R6BB104" CAPC1005X05L 53.2,32.85 r270 bottom value="0402 0,1 мкФ 10В X7R"
C142 "CC0402KRX5R6BB104" CAPC1005X05L 54.8,33.55 r90 bottom value="0402 0,1 мкФ 10В X7R"
C143 "CC0402KRX5R6BB104" CAPC1005X05L 7.6,8.375 r90 top value="0402 0,1 мкФ 10В X7R"
DA1 "TPS563210A" TSOP65P280X110-8L 68.25,47.5 r90 top
DA2 "TPS563210A" TSOP65P280X110-8L 85.975,38.675 r90 top
DA3 "TPS563210A" TSOP65P280X110-8L 73.775,44.525 r180 top
DA4 "TPS566231" "VQFN-HR 9" 40.57,21.429 r0 top
DA5 "TPS65142RTGR" PQFN40P600X300X80_HS-33N 70.316,32.557 r90 top
DA6 "TPS563210A" TSOP65P280X110-8L 31.1,51.275 r90 top
DA7 "LM60440DRPKR" WQFN-13 80.35,50.125 r90 top
DA8 "TPS560430" TSOP65P280X110-8L 80.475,21.4 r90 top
DA9 "LP5907MFX-1.2" SOT95P280X145-5L 27.8,28.275 r180 top
DA10 "TSC2007IPWR" TSOP65P640X120-16N 4.125,11.025 r90 top
DD1 "XC7Z010-2CLG400I" BGA400C80P20X20_1700X1700X147 47.6,36.4 r0 top
DD2 "MT41K256M16HA-125" BGA96C80P9X16_800X1400X110 30.2,38 r0 top
DD3 "W25Q256JVEIQ" SON127P800X70_HS-9N 53.25,49.85 r180 top
DD4 "STM32F030F4" TSOP65P640X120-20L 28.6,21.625 r0 top
DD5 "MAX13433EETD+" SON40P300X80_HS-15L 82.675,45.375 r0 top
G1 "ASFLMB-33.333MHZ" XTAL_ASFLMB-33.333MHZ-LC-T 46.375,49.32 r0 top value="33.333 MHz"
L1 "XGL4020-222ME" INDCXGL4020 64.175,49.45 r0 top value="XGL4020 2,2мкГн"
L2 "XGL4020-222ME" INDCXGL4020 81.9,40.725 r0 top value="XGL4020 2,2мкГн"
L3 "XGL4020-222ME" INDCXGL4020 73.25,40.575 r180 top value="XGL4020 2,2мкГн"
L4 "XGL4020-102ME" INDCXGL4020 44.55,21.2 r180 top value="XGL4020 1мкГн"
L5 "BLM18PG121SN1D" INDC1608X05L 42.975,52.525 r180 top
L6 "1812PS-103KR" INDC1812PS 67.28,24.225 r0 top value="1812PS 10мкГн 10%"
L7 "1812PS-103KR" INDC1812PS 79.795,31.85 r180 top value="1812PS 10мкГн 10%"
L8 "BLM18PG121SN1D" INDC1608X05L 62.65,11.82 r90 top
L9 "XGL4020-222ME" INDCXGL4020 27.15,49.775 r90 top value="XGL4020 2,2мкГн"
L10 "XGL4020-222ME" INDCXGL4020 75.9,50.125 r0 top value="XGL4020 2,2мкГн"
L11 "BLM18PG121SN1D" INDC1608X05L 85.2,58.225 r180 top
L12 "1812PS-103KR" INDC1812PS 79.8,26.35 r0 top value="1812PS 10мкГн 10%"
L13 "BLM18PG121SN1D" INDC1608X05L 84,49.275 r90 top
R1 "RC0402JR-0710KL" RESC1005X04L 69.4,51.875 r180 top value="0402 10 кОм 5%"
R2 "RC0402JR-0733KL" RESC1005X04L 68.65,50.475 r270 top value="0402 33 кОм 5%"
R3 "RC0402JR-0710KL" RESC1005X04L 69.9,50.05 r0 top value="0402 10 кОм 5%"
R4 "RC0402JR-0722KL" RESC1005X04L 86.475,41.675 r270 top value="0402 22 кОм 5%"
R5 "RC0402JR-0710KL" RESC1005X04L 87.775,41.25 r0 top value="0402 10 кОм 5%"
R6 "RC0402JR-0727KL" RESC1005X04L 70.925,45.175 r0 top value="0402 27 кОм 5%"
R7 "RC0402JR-07100KL" RESC1005X04L 67.025,52.3 r270 top value="0402 100 кОм 5%"
R8 "RC0402JR-0720KL" RESC1005X04L 70.925,46 r180 top value="0402 20 кОм 5%"
R9 "RC0402JR-0720KL" RESC1005X04L 37.775,19.575 r90 top value="0402 20 кОм 5%"
R10 "RC0402JR-0730KL" RESC1005X04L 38.6,19.575 r90 top value="0402 30 кОм 5%"
R11 "RC0402JR-0710KL" RESC1005X04L 17.35,15.9 r90 top value="0402 10 кОм 5%"
R12 "RC0402JR-0710KL" RESC1005X04L 16.475,15.9 r90 top value="0402 10 кОм 5%"
R13 "RC0402JR-071RL" RESC1005X04L 57.45,43.2 r180 top value="0402 1 Ом 5%"
R14 "RC0402JR-071RL" RESC1005X04L 57.45,38.4 r180 top value="0402 1 Ом 5%"
R15 "RC0402JR-071RL" RESC1005X04L 57.45,44.075 r180 top value="0402 1 Ом 5%"
R16 "RC0402JR-071RL" RESC1005X04L 57.45,42.3 r180 top value="0402 1 Ом 5%"
R17 "RC0402JR-0710KL" RESC1005X04L 84.688,10.35 r90 top value="0402 10 кОм 5%"
R18 "RC0402JR-07180KL" RESC1005X04L 85.025,47.875 r90 top value="0402 180 кОм 5%"
R19 "RC0402JR-07180KL" RESC1005X04L 85.85,47.875 r270 top value="0402 180 кОм 5%"
R20 "RC0402JR-0710KL" RESC1005X04L 17.325,12.425 r180 top value="0402 10 кОм 5%"
R21 "RC0402JR-07100RL" RESC1005X04L 62.95,40.375 r180 top value="0402 100 Ом 5%"
R22 "RC0402JR-07240KL" RESC1005X04L 68.075,39 r270 top value="0402 240 кОм 5%"
R23 "RC0402JR-0722RL" RESC1005X04L 61.575,12.025 r90 top value="0402 22 Ом 5%"
R24 "RC0402JR-0722RL" RESC1005X04L 61.05,9.475 r90 bottom value="0402 22 Ом 5%"
R25 "RC0402JR-07120KL" RESC1005X04L 63.075,32.225 r270 top value="0402 120 кОм 5%"
R26 "RC0402JR-0722RL" RESC1005X04L 60.575,12.05 r90 top value="0402 22 Ом 5%"
R27 "RC0402JR-07130KL" RESC1005X04L 75.475,26.85 r90 top value="0402 130 кОм 5%"
R28 "RC0402JR-0710RL" RESC1005X04L 69.1,27.35 r180 top value="0402 10 Ом 5%"
R29 "RC0402JR-0722RL" RESC1005X04L 60.05,9.475 r90 bottom value="0402 22 Ом 5%"
R30 "RC0402JR-0718KL" RESC1005X04L 68.975,39 r270 top value="0402 18 кОм 5%"
R31 "RC0402JR-0722RL" RESC1005X04L 59.525,12.075 r90 top value="0402 22 Ом 5%"
R32 "RC0402JR-0768KL" RESC1005X04L 75.475,28.45 r270 top value="0402 68 кОм 5%"
R33 "RC0402JR-0718KL" RESC1005X04L 63.075,30.025 r270 top value="0402 18 кОм 5%"
R34 "RC0402JR-0722RL" RESC1005X04L 59.05,9.475 r90 bottom value="0402 22 Ом 5%"
R35 "RC0402JR-0722RL" RESC1005X04L 58.525,12.075 r90 top value="0402 22 Ом 5%"
R36 "RC0402JR-0727KL" RESC1005X04L 73.125,30.35 r180 top value="0402 27 кОм 5%"
R37 "RC0402JR-0722RL" RESC1005X04L 58.05,9.5 r90 bottom value="0402 22 Ом 5%"
R38 "RC0402JR-0722RL" RESC1005X04L 57.5,12.075 r90 top value="0402 22 Ом 5%"
R39 "RC0402JR-0718KL" RESC1005X04L 73.125,29.525 r180 top value="0402 18 кОм 5%"
R40 "RC0402JR-0722RL" RESC1005X04L 57.025,9.5 r90 bottom value="0402 22 Ом 5%"
R41 "RC0402JR-0722RL" RESC1005X04L 56.525,12.075 r90 top value="0402 22 Ом 5%"
R42 "RC0402JR-0722RL" RESC1005X04L 56.025,9.5 r90 bottom value="0402 22 Ом 5%"
R43 "RC0402JR-071KL" RESC1005X04L 62.2,32.25 r270 top value="0402 1 кОм 5%"
R44 "RC0402JR-0722RL" RESC1005X04L 55.523,12.075 r90 top value="0402 22 Ом 5%"
R45 "RC0402JR-0722RL" RESC1005X04L 55.025,9.5 r90 bottom value="0402 22 Ом 5%"
R46 "RC0402JR-0733KL" RESC1005X04L 62.2,30.025 r90 top value="0402 33 кОм 5%"
R47 "RC0402JR-0722RL" RESC1005X04L 54.521,12.075 r90 top value="0402 22 Ом 5%"
R48 "RC0402JR-0710KL" RESC1005X04L 73.125,32.55 r0 top value="0402 10 кОм 5%"
R49 "RC0402JR-0710KL" RESC1005X04L 72,36.725 r0 top value="0402 10 кОм 5%"
R50 "RC0402JR-0722RL" RESC1005X04L 54.025,9.5 r90 bottom value="0402 22 Ом 5%"
R51 "RC0402JR-07110KL" RESC1005X04L 67.975,35.05 r270 top value="0402 110 кОм 5%"
R52 "RC0402JR-0751RL" RESC1005X04L 74.3,34.1 r180 top value="0402 51 Ом 5%"
R53 "RC0402JR-0722RL" RESC1005X04L 53.519,12.075 r90 top value="0402 22 Ом 5%"
R54 "RC0402JR-0722RL" RESC1005X04L 53.025,9.5 r90 bottom value="0402 22 Ом 5%"
R55 "RC0402JR-0722RL" RESC1005X04L 52.517,12.075 r90 top value="0402 22 Ом 5%"
R56 "RC0402JR-0722RL" RESC1005X04L 52.025,9.5 r90 bottom value="0402 22 Ом 5%"
R57 "RC0402JR-0722RL" RESC1005X04L 51.515,12.075 r90 top value="0402 22 Ом 5%"
R58 "RC0402JR-0722RL" RESC1005X04L 51.025,9.5 r90 bottom value="0402 22 Ом 5%"
R59 "RC0402JR-0722RL" RESC1005X04L 50.513,12.075 r90 top value="0402 22 Ом 5%"
R60 "RC0402JR-0722RL" RESC1005X04L 50.025,9.5 r90 bottom value="0402 22 Ом 5%"
R61 "RC0402FR-0761K9L" RESC1005X04L 72.6,35.45 r270 top value="0402 61,9 кОм 1%"
R62 "RC0402JR-0722RL" RESC1005X04L 49.512,12.075 r90 top value="0402 22 Ом 5%"
R63 "RC0402JR-0722RL" RESC1005X04L 49.025,9.5 r90 bottom value="0402 22 Ом 5%"
R64 "RC0402JR-0722RL" RESC1005X04L 48.51,12.075 r90 top value="0402 22 Ом 5%"
R65 "RC0402JR-0722RL" RESC1005X04L 48.025,9.5 r90 bottom value="0402 22 Ом 5%"
R66 "RC0402JR-0722RL" RESC1005X04L 47.45,12.075 r90 top value="0402 22 Ом 5%"
R67 "RC0402JR-071KL" RESC1005X04L 24.6,47 r180 top value="0402 1 кОм 5%"
R68 "RC0402FR-0780R6L" RESC1005X04L 30.687,37.65 r90 bottom value="0402 80,6 Ом 1%"
R69 "RC0402JR-071KL" RESC1005X04L 26.45,47 r0 top value="0402 1 кОм 5%"
R70 "RC0402JR-07240RL" RESC1005X04L 31.091,35.804 r0 bottom value="0402 240 Ом 5%"
R71 "RC0402JR-079K1L" RESC1005X04L 32.225,53.725 r180 top value="0402 9,1 кОм 5%"
R72 "RC0402JR-0712KL" RESC1005X04L 30.625,53.725 r180 top value="0402 12 кОм 5%"
R73 "RC0402JR-071KL" RESC1005X04L 42.15,48.75 r270 top value="0402 1 кОм 5%"
R74 "RC0402FR-0780R6L" RESC1005X04L 41.25,48.75 r90 top value="0402 80,6 Ом 1%"
R75 "RC0402JR-071KL" RESC1005X04L 41.625,45.725 r0 top value="0402 1 кОм 5%"
R76 "RC0402FR-0780R6L" RESC1005X04L 40.4,48.75 r270 top value="0402 80,6 Ом 1%"
R77 "RC0402JR-0710KL" RESC1005X04L 48.05,43.625 r0 bottom value="0402 10 кОм 5%"
R78 "RC0402JR-0710KL" RESC1005X04L 41.425,59.225 r270 bottom value="0402 10 кОм 5%"
R79 "RC0402JR-0710KL" RESC1005X04L 39.425,59.275 r270 bottom value="0402 10 кОм 5%"
R80 "RC0402JR-0710KL" RESC1005X04L 43.572,34.368 r270 bottom value="0402 10 кОм 5%"
R81 "RC0402JR-0710KL" RESC1005X04L 46.95,26.725 r270 top value="0402 10 кОм 5%"
R82 "RC0402JR-0710KL" RESC1005X04L 43.585,36.025 r90 bottom value="0402 10 кОм 5%"
R83 "RC0402JR-0710KL" RESC1005X04L 58.85,47.05 r0 top value="0402 10 кОм 5%"
R84 "RC0402JR-0710KL" RESC1005X04L 58.85,47.95 r0 top value="0402 10 кОм 5%"
R85 "RC0402JR-0720KL" RESC1005X04L 55.35,62.325 r90 top value="0402 20 кОм 5%"
R86 "RC0402JR-0720KL" RESC1005X04L 47.5,53.425 r180 top value="0402 20 кОм 5%"
R87 "RC0402JR-0720KL" RESC1005X04L 58.85,49.225 r0 top value="0402 20 кОм 5%"
R88 "RC0402JR-0720KL" RESC1005X04L 58.85,50.475 r0 top value="0402 20 кОм 5%"
R89 "RC0402JR-0720KL" RESC1005X04L 47.5,52.6 r180 top value="0402 20 кОм 5%"
R90 "RC0402JR-0720KL" RESC1005X04L 57.45,44.9 r0 top value="0402 20 кОм 5%"
R91 "RC0402JR-0720KL" RESC1005X04L 43.175,46.5 r90 top value="0402 20 кОм 5%"
R92 "RC0402JR-07100KL" RESC1005X04L 81.4,52.075 r0 top value="0402 100 кОм 5%"
R93 "RC0402JR-0724KL" RESC1005X04L 82.75,51.625 r270 top value="0402 24 кОм 5%"
R94 "RC0402JR-0710KL" RESC1005X04L 23.625,20.25 r180 top value="0402 10 кОм 5%"
R95 "RC0402JR-07100RL" RESC1005X04L 82.725,58.475 r90 top value="0402 100 Ом 5%"
R96 "RC0402JR-07100RL" RESC1005X04L 82.025,18.925 r180 top value="0402 100 Ом 5%"
R97 "RC0402JR-0751KL" RESC1005X04L 82.025,18.05 r180 top value="0402 51 кОм 5%"
R98 "RC0402JR-0722KL" RESC1005X04L 80.375,18.925 r0 top value="0402 22 кОм 5%"
R99 "RC0402JR-0710KL" RESC1005X04L 78.05,10.325 r90 top value="0402 10 кОм 5%"
R100 "RC0402JR-0710KL" RESC1005X04L 72.179,10.325 r90 top value="0402 10 кОм 5%"
R101 "RC0402JR-0710KL" RESC1005X04L 71.2,10.325 r90 bottom value="0402 10 кОм 5%"
R102 "RC0402JR-0710KL" RESC1005X04L 73.157,10.375 r90 top value="0402 10 кОм 5%"
R103 "RC0402JR-07100RL" RESC1005X04L 71.2,10.325 r270 top value="0402 100 Ом 5%"
R104 "RC0402JR-0710KL" RESC1005X04L 74.136,10.325 r90 top value="0402 10 кОм 5%"
R105 "RC0402JR-0710KL" RESC1005X04L 28.75,13.425 r180 bottom value="0402 10 кОм 5%"
R106 "RC0402JR-07100RL" RESC1005X04L 40.75,13.45 r0 bottom value="0402 100 Ом 5%"
R107 "RC0402JR-0710KL" RESC1005X04L 75.114,10.325 r90 top value="0402 10 кОм 5%"
R108 "RC0402JR-0710KL" RESC1005X04L 76.093,10.325 r90 top value="0402 10 кОм 5%"
R109 "RC0402JR-07100RL" RESC1005X04L 25.775,25.7 r180 top value="0402 100 Ом 5%"
R110 "RC0402JR-0710KL" RESC1005X04L 77.071,10.325 r90 top value="0402 10 кОм 5%"
R111 "RC0402JR-0710KL" RESC1005X04L 85.625,10.35 r90 top value="0402 10 кОм 5%"
R112 "RC0402JR-0710KL" RESC1005X04L 86.562,10.35 r90 top value="0402 10 кОм 5%"
R113 "RC0402JR-0710KL" RESC1005X04L 87.5,10.35 r90 top value="0402 10 кОм 5%"
R114 "RC0402JR-0710KL" RESC1005X04L 88.437,10.35 r90 top value="0402 10 кОм 5%"
R115 "RC0402JR-0710KL" RESC1005X04L 89.375,10.35 r90 top value="0402 10 кОм 5%"
R116 "RC0402JR-0710KL" RESC1005X04L 90.312,10.35 r90 top value="0402 10 кОм 5%"
R117 "RC0402JR-0710KL" RESC1005X04L 22.45,12.425 r0 top value="0402 10 кОм 5%"
R118 "RC0402JR-07100RL" RESC1005X04L 19.425,7.575 r270 top value="0402 100 Ом 5%"
R119 "RC0402JR-07100RL" RESC1005X04L 21.425,7.525 r270 top value="0402 100 Ом 5%"
R120 "RC0402JR-071RL" RESC1005X04L 57.45,35.2 r180 top value="0402 1 Ом 5%"
R121 "RC0402JR-071RL" RESC1005X04L 57.45,36 r180 top value="0402 1 Ом 5%"
R122 "RC0402JR-074K7L" RESC1005X04L 4.25,16.225 r90 top value="0402 4,7 кОм 5%"
R123 "RC0402JR-074K7L" RESC1005X04L 5.3,16.225 r90 top value="0402 4,7 кОм 5%"
R124 "RC0402JR-074K7L" RESC1005X04L 6.375,16.225 r90 top value="0402 4,7 кОм 5%"
VD1 "BAT54S" SOT95P240X120-3L 65.675,41.675 r90 top
VD2 "B340A" DIOM5127X23L 65.525,30 r270 top
VD3 "BAT54S" SOT95P240X120-3L 65.65,38.125 r270 top
VD4 "BAT54S" SOT95P240X120-3L 73.375,27.375 r180 top
VD5 "B340A" DIOM5127X23L 77.825,36.175 r0 top
VD6 "BAT54S" SOT95P240X120-3L 17.8,10.275 r90 top
VD7 "BAT54S" SOT95P240X120-3L 21.2,10.275 r90 top
X1 "LCD 50p" CON_541325062_MOL 52.8,4.327 r180 bottom
XP1 "WB-05" "WB-05 (MW-5M) PITCH 2.00MM" 12.8,12.775 r90 top
XP3 "WB-03" "WB-03 (MW-3M) PITCH 2.00MM" 12.775,26.175 r90 top
XP4 "WB-03" "WB-03 (MW-3M) PITCH 2.00MM" 12.775,35.333 r90 top
XP5 "WB-02" "WB-02 (MW-2M) PITCH 2.00MM" 96.025,57.25 r90 top
XP6 "WB-03" "WB-03 (MW-3M) PITCH 2.00MM" 12.775,53.65 r90 top
XP8 "WB-03" "WB-03 (MW-3M) PITCH 2.00MM" 95.977,23.975 r90 top
XP9 "WB-03" "WB-03 (MW-3M) PITCH 2.00MM" 12.775,44.492 r90 top
XP10 "PLS-3" "PLS-3 (DS1021-1x3)" 52.675,60.235 r180 top
XP12 "PLS-6" HDR1X6 40.29,12 r180 top
XP13 "WB-03" "WB-03 (MW-3M) PITCH 2.00MM" 95.977,33.45 r90 top
XP14 "WB-03" "WB-03 (MW-3M) PITCH 2.00MM" 19.45,4.025 r0 top
XS1 "KLS1-SATA001" KLS1-SATA001 66.405,59.3 r180 top
XS2 "IDC2-14MS" IDC2-14MS 43.425,63.425 r270 top
XS3 "FH12-10S-0.5SVA" FH12-10S-0.5SH 82.5,61.15 r180 top
XS4 "FH12-20S-0.5SVA" FH12-20S-0.5SVA 96.55,47.5 r270 top
XS5 "FH12-10S-0.5SVA" FH12-10S-0.5SH 74.9,7.325 r0 top
XS6 "FH12-10S-0.5SVA" FH12-10S-0.5SH 87.45,7.325 r0 top
Z1 "EClamp2394P" SON50P160X65_HS-9N 86.75,45.325 r0 top

## Footprints (in the part's own frame and the unit in brackets; to place one, negate y for a bottom-side part, rotate by r counter-clockwise, add the part's x,y. Pads: shape width x height; smd on the part's side, far side on the other; paste and mask are expansions set on the pad)
BGA96C80P9X16_800X1400X110 [mm] "BGA, 96-Leads, Body 8,00x14,00mmx1,10mm, Pitch 0,80mm"
  round 0.42 smd mask+0.07: A1(-3.2,6) A2(-2.4,6) A3(-1.6,6) A7(1.6,6) A8(2.4,6) A9(3.2,6) B1(-3.2,5.2) B2(-2.4,5.2) B3(-1.6,5.2) B7(1.6,5.2) B8(2.4,5.2) B9(3.2,5.2) C1(-3.2,4.4) C2(-2.4,4.4) C3(-1.6,4.4) C7(1.6,4.4) C8(2.4,4.4) C9(3.2,4.4) D1(-3.2,3.6) D2(-2.4,3.6) D3(-1.6,3.6) D7(1.6,3.6) D8(2.4,3.6) D9(3.2,3.6) E1(-3.2,2.8) E2(-2.4,2.8) E3(-1.6,2.8) E7(1.6,2.8) E8(2.4,2.8) E9(3.2,2.8) F1(-3.2,2) F2(-2.4,2) F3(-1.6,2) F7(1.6,2) F8(2.4,2) F9(3.2,2) G1(-3.2,1.2) G2(-2.4,1.2) G3(-1.6,1.2) G7(1.6,1.2) G8(2.4,1.2) G9(3.2,1.2) H1(-3.2,0.4) H2(-2.4,0.4) H3(-1.6,0.4) H7(1.6,0.4) H8(2.4,0.4) H9(3.2,0.4) J1(-3.2,-0.4) J2(-2.4,-0.4) J3(-1.6,-0.4) J7(1.6,-0.4) J8(2.4,-0.4) J9(3.2,-0.4) K1(-3.2,-1.2) K2(-2.4,-1.2) K3(-1.6,-1.2) K7(1.6,-1.2) K8(2.4,-1.2) K9(3.2,-1.2) L1(-3.2,-2) L2(-2.4,-2) L3(-1.6,-2) L7(1.6,-2) L8(2.4,-2) L9(3.2,-2) M1(-3.2,-2.8) M2(-2.4,-2.8) M3(-1.6,-2.8) M7(1.6,-2.8) M8(2.4,-2.8) M9(3.2,-2.8) N1(-3.2,-3.6) N2(-2.4,-3.6) N3(-1.6,-3.6) N7(1.6,-3.6) N8(2.4,-3.6) N9(3.2,-3.6) P1(-3.2,-4.4) P2(-2.4,-4.4) P3(-1.6,-4.4) P7(1.6,-4.4) P8(2.4,-4.4) P9(3.2,-4.4) R1(-3.2,-5.2) R2(-2.4,-5.2) R3(-1.6,-5.2) R7(1.6,-5.2) R8(2.4,-5.2) R9(3.2,-5.2) T1(-3.2,-6) T2(-2.4,-6) T3(-1.6,-6) T7(1.6,-6) T8(2.4,-6) T9(3.2,-6)
  silkscreen extent -4,-7 4,7, body extent -4,-7 4,7, height 1.1
BGA400C80P20X20_1700X1700X147 [mm] "BGA, 400-Leads, Body 17,00x17,00mmx1,47mm, Pitch 0,80mm"
  round 0.45 smd: A1(-7.6,7.6) A2(-6.8,7.6) A3(-6,7.6) A4(-5.2,7.6) A5(-4.4,7.6) A6(-3.6,7.6) A7(-2.8,7.6) A8(-2,7.6) A9(-1.2,7.6) A10(-0.4,7.6) A11(0.4,7.6) A12(1.2,7.6) A13(2,7.6) A14(2.8,7.6) A15(3.6,7.6) A16(4.4,7.6) A17(5.2,7.6) A18(6,7.6) A19(6.8,7.6) A20(7.6,7.6) B1(-7.6,6.8) B2(-6.8,6.8) B3(-6,6.8) B4(-5.2,6.8) B5(-4.4,6.8) B6(-3.6,6.8) B7(-2.8,6.8) B8(-2,6.8) B9(-1.2,6.8) B10(-0.4,6.8) B11(0.4,6.8) B12(1.2,6.8) B13(2,6.8) B14(2.8,6.8) B15(3.6,6.8) B16(4.4,6.8) B17(5.2,6.8) B18(6,6.8) B19(6.8,6.8) B20(7.6,6.8) C1(-7.6,6) C2(-6.8,6) C3(-6,6) C4(-5.2,6) C5(-4.4,6) C6(-3.6,6) C7(-2.8,6) C8(-2,6) C9(-1.2,6) C10(-0.4,6) C11(0.4,6) C12(1.2,6) C13(2,6) C14(2.8,6) C15(3.6,6) C16(4.4,6) C17(5.2,6) C18(6,6) C19(6.8,6) C20(7.6,6) D1(-7.6,5.2) D2(-6.8,5.2) D3(-6,5.2) D4(-5.2,5.2) D5(-4.4,5.2) D6(-3.6,5.2) D7(-2.8,5.2) D8(-2,5.2) D9(-1.2,5.2) D10(-0.4,5.2) D11(0.4,5.2) D12(1.2,5.2) D13(2,5.2) D14(2.8,5.2) D15(3.6,5.2) D16(4.4,5.2) D17(5.2,5.2) D18(6,5.2) D19(6.8,5.2) D20(7.6,5.2) E1(-7.6,4.4) E2(-6.8,4.4) E3(-6,4.4) E4(-5.2,4.4) E5(-4.4,4.4) E6(-3.6,4.4) E7(-2.8,4.4) E8(-2,4.4) E9(-1.2,4.4) E10(-0.4,4.4) E11(0.4,4.4) E12(1.2,4.4) E13(2,4.4) E14(2.8,4.4) E15(3.6,4.4) E16(4.4,4.4) E17(5.2,4.4) E18(6,4.4) E19(6.8,4.4) E20(7.6,4.4) F1(-7.6,3.6) F2(-6.8,3.6) F3(-6,3.6) F4(-5.2,3.6) F5(-4.4,3.6) F6(-3.6,3.6) F7(-2.8,3.6) F8(-2,3.6) F9(-1.2,3.6) F10(-0.4,3.6) F11(0.4,3.6) F12(1.2,3.6) F13(2,3.6) F14(2.8,3.6) F15(3.6,3.6) F16(4.4,3.6) F17(5.2,3.6) F18(6,3.6) F19(6.8,3.6) F20(7.6,3.6) G1(-7.6,2.8) G2(-6.8,2.8) G3(-6,2.8) G4(-5.2,2.8) G5(-4.4,2.8) G6(-3.6,2.8) G7(-2.8,2.8) G8(-2,2.8) G9(-1.2,2.8) G10(-0.4,2.8) G11(0.4,2.8) G12(1.2,2.8) G13(2,2.8) G14(2.8,2.8) G15(3.6,2.8) G16(4.4,2.8) G17(5.2,2.8) G18(6,2.8) G19(6.8,2.8) G20(7.6,2.8) H1(-7.6,2) H2(-6.8,2) H3(-6,2) H4(-5.2,2) H5(-4.4,2) H6(-3.6,2) H7(-2.8,2) H8(-2,2) H9(-1.2,2) H10(-0.4,2) H11(0.4,2) H12(1.2,2) H13(2,2) H14(2.8,2) H15(3.6,2) H16(4.4,2) H17(5.2,2) H18(6,2) H19(6.8,2) H20(7.6,2) J1(-7.6,1.2) J2(-6.8,1.2) J3(-6,1.2) J4(-5.2,1.2) J5(-4.4,1.2) J6(-3.6,1.2) J7(-2.8,1.2) J8(-2,1.2) J9(-1.2,1.2) J10(-0.4,1.2) J11(0.4,1.2) J12(1.2,1.2) J13(2,1.2) J14(2.8,1.2) J15(3.6,1.2) J16(4.4,1.2) J17(5.2,1.2) J18(6,1.2) J19(6.8,1.2) J20(7.6,1.2) K1(-7.6,0.4) K2(-6.8,0.4) K3(-6,0.4) K4(-5.2,0.4) K5(-4.4,0.4) K6(-3.6,0.4) K7(-2.8,0.4) K8(-2,0.4) K9(-1.2,0.4) K10(-0.4,0.4) K11(0.4,0.4) K12(1.2,0.4) K13(2,0.4) K14(2.8,0.4) K15(3.6,0.4) K16(4.4,0.4) K17(5.2,0.4) K18(6,0.4) K19(6.8,0.4) K20(7.6,0.4) L1(-7.6,-0.4) L2(-6.8,-0.4) L3(-6,-0.4) L4(-5.2,-0.4) L5(-4.4,-0.4) L6(-3.6,-0.4) L7(-2.8,-0.4) L8(-2,-0.4) L9(-1.2,-0.4) L10(-0.4,-0.4) L11(0.4,-0.4) L12(1.2,-0.4) L13(2,-0.4) L14(2.8,-0.4) L15(3.6,-0.4) L16(4.4,-0.4) L17(5.2,-0.4) L18(6,-0.4) L19(6.8,-0.4) L20(7.6,-0.4) M1(-7.6,-1.2) M2(-6.8,-1.2) M3(-6,-1.2) M4(-5.2,-1.2) M5(-4.4,-1.2) M6(-3.6,-1.2) M7(-2.8,-1.2) M8(-2,-1.2) M9(-1.2,-1.2) M10(-0.4,-1.2) M11(0.4,-1.2) M12(1.2,-1.2) M13(2,-1.2) M14(2.8,-1.2) M15(3.6,-1.2) M16(4.4,-1.2) M17(5.2,-1.2) M18(6,-1.2) M19(6.8,-1.2) M20(7.6,-1.2) N1(-7.6,-2) N2(-6.8,-2) N3(-6,-2) N4(-5.2,-2) N5(-4.4,-2) N6(-3.6,-2) N7(-2.8,-2) N8(-2,-2) N9(-1.2,-2) N10(-0.4,-2) N11(0.4,-2) N12(1.2,-2) N13(2,-2) N14(2.8,-2) N15(3.6,-2) N16(4.4,-2) N17(5.2,-2) N18(6,-2) N19(6.8,-2) N20(7.6,-2) P1(-7.6,-2.8) P2(-6.8,-2.8) P3(-6,-2.8) P4(-5.2,-2.8) P5(-4.4,-2.8) P6(-3.6,-2.8) P7(-2.8,-2.8) P8(-2,-2.8) P9(-1.2,-2.8) P10(-0.4,-2.8) P11(0.4,-2.8) P12(1.2,-2.8) P13(2,-2.8) P14(2.8,-2.8) P15(3.6,-2.8) P16(4.4,-2.8) P17(5.2,-2.8) P18(6,-2.8) P19(6.8,-2.8) P20(7.6,-2.8) R1(-7.6,-3.6) R2(-6.8,-3.6) R3(-6,-3.6) R4(-5.2,-3.6) R5(-4.4,-3.6) R6(-3.6,-3.6) R7(-2.8,-3.6) R8(-2,-3.6) R9(-1.2,-3.6) R10(-0.4,-3.6) R11(0.4,-3.6) R12(1.2,-3.6) R13(2,-3.6) R14(2.8,-3.6) R15(3.6,-3.6) R16(4.4,-3.6) R17(5.2,-3.6) R18(6,-3.6) R19(6.8,-3.6) R20(7.6,-3.6) T1(-7.6,-4.4) T2(-6.8,-4.4) T3(-6,-4.4) T4(-5.2,-4.4) T5(-4.4,-4.4) T6(-3.6,-4.4) T7(-2.8,-4.4) T8(-2,-4.4) T9(-1.2,-4.4) T10(-0.4,-4.4) T11(0.4,-4.4) T12(1.2,-4.4) T13(2,-4.4) T14(2.8,-4.4) T15(3.6,-4.4) T16(4.4,-4.4) T17(5.2,-4.4) T18(6,-4.4) T19(6.8,-4.4) T20(7.6,-4.4) U1(-7.6,-5.2) U2(-6.8,-5.2) U3(-6,-5.2) U4(-5.2,-5.2) U5(-4.4,-5.2) U6(-3.6,-5.2) U7(-2.8,-5.2) U8(-2,-5.2) U9(-1.2,-5.2) U10(-0.4,-5.2) U11(0.4,-5.2) U12(1.2,-5.2) U13(2,-5.2) U14(2.8,-5.2) U15(3.6,-5.2) U16(4.4,-5.2) U17(5.2,-5.2) U18(6,-5.2) U19(6.8,-5.2) U20(7.6,-5.2) V1(-7.6,-6) V2(-6.8,-6) V3(-6,-6) V4(-5.2,-6) V5(-4.4,-6) V6(-3.6,-6) V7(-2.8,-6) V8(-2,-6) V9(-1.2,-6) V10(-0.4,-6) V11(0.4,-6) V12(1.2,-6) V13(2,-6) V14(2.8,-6) V15(3.6,-6) V16(4.4,-6) V17(5.2,-6) V18(6,-6) V19(6.8,-6) V20(7.6,-6) W1(-7.6,-6.8) W2(-6.8,-6.8) W3(-6,-6.8) W4(-5.2,-6.8) W5(-4.4,-6.8) W6(-3.6,-6.8) W7(-2.8,-6.8) W8(-2,-6.8) W9(-1.2,-6.8) W10(-0.4,-6.8) W11(0.4,-6.8) W12(1.2,-6.8) W13(2,-6.8) W14(2.8,-6.8) W15(3.6,-6.8) W16(4.4,-6.8) W17(5.2,-6.8) W18(6,-6.8) W19(6.8,-6.8) W20(7.6,-6.8) Y1(-7.6,-7.6) Y2(-6.8,-7.6) Y3(-6,-7.6) Y4(-5.2,-7.6) Y5(-4.4,-7.6) Y6(-3.6,-7.6) Y7(-2.8,-7.6) Y8(-2,-7.6) Y9(-1.2,-7.6) Y10(-0.4,-7.6) Y11(0.4,-7.6) Y12(1.2,-7.6) Y13(2,-7.6) Y14(2.8,-7.6) Y15(3.6,-7.6) Y16(4.4,-7.6) Y17(5.2,-7.6) Y18(6,-7.6) Y19(6.8,-7.6) Y20(7.6,-7.6)
  silkscreen extent -9.27,-8.5 8.5,8.5, body extent -8.5,-8.5 8.5,8.5, height 1.47
CAPC1005X05L [mm] "Chip Capacitor, 2-Leads, Body 1,00x0,50mm, IPC High Density"
  rect 0.44x0.54 smd: 1(-0.45,0) 2(0.45,0)
  body extent -0.5,-0.25 0.5,0.25, height 0.5
CAPC1608X08L [mm] "Chip Capacitor, 2-Leads, Body 1,60x0,80mm, IPC High Density"
  rect 0.7x0.85 smd: 1(-0.675,0) 2(0.675,0)
  body extent -0.8,-0.4 0.8,0.4, height 0.8
CAPC2012X09L [mm] "Chip Capacitor, 2-Leads, Body 2,00x1,25mm, IPC High Density"
  rect 0.8x1.3 smd: 1(-0.825,0) 2(0.825,0)
  silkscreen extent -0.05,-0.55 0.05,0.55, body extent -1,-0.63 1,0.63, height 0.9
CAPC3216X12L [mm] "Chip Capacitor, 2-Leads, Body 3,20x1,60mm, IPC High Density"
  rect 1x1.65 smd: 1(-1.325,0) 2(1.325,0)
  silkscreen extent -0.45,-0.72 0.45,0.72, body extent -1.6,-0.8 1.6,0.8, height 1.25
CON_541325062_MOL [mm]
  rect 0.3x1.2 smd paste+0 mask+0.076: 1(-12.25,2.498) 2(-11.75,2.498) 3(-11.25,2.498) 4(-10.75,2.498) 5(-10.25,2.498) 6(-9.75,2.498) 7(-9.25,2.498) 8(-8.75,2.498) 9(-8.25,2.498) 10(-7.75,2.498) 11(-7.25,2.498) 12(-6.75,2.498) 13(-6.25,2.498) 14(-5.75,2.498) 15(-5.25,2.498) 16(-4.75,2.498) 17(-4.25,2.498) 18(-3.75,2.498) 19(-3.25,2.498) 20(-2.75,2.498) 21(-2.25,2.498) 22(-1.75,2.498) 23(-1.25,2.498) 24(-0.75,2.498) 25(-0.25,2.498) 26(0.25,2.498) 27(0.75,2.498) 28(1.25,2.498) 29(1.75,2.498) 30(2.25,2.498) 31(2.75,2.498) 32(3.25,2.498) 33(3.75,2.498) 34(4.25,2.498) 35(4.75,2.498) 36(5.25,2.498) 37(5.75,2.498) 38(6.25,2.498) 39(6.75,2.498) 40(7.25,2.498) 41(7.75,2.498) 42(8.25,2.498) 43(8.75,2.498) 44(9.25,2.498) 45(9.75,2.498) 46(10.25,2.498) 47(10.75,2.498) 48(11.25,2.498) 49(11.75,2.498) 50(12.25,2.498)
  rect 1.6x2.4 smd paste+0 mask+0.076: P1(-13.95,-0.202) P2(13.95,-0.202)
  Top Layer region: 14.75,-1.402 15.55,-1.402 15.55,0.198 14.75,0.198
  Top Layer region: -14.75,-1.402 -15.55,-1.402 -15.55,0.198 -14.75,0.198
  silkscreen extent -15.25,-2.8 15.25,5.65, body extent -15.25,-2.75 15.25,2.85, height 2.05
DIOM5127X23L [mm] "Molded Diode, 2-Leads, Body 5,11x2,67mm, IPC High Density"
  rect 2x1.45 smd: 1(-1.875,0) 2(1.875,0)
  silkscreen extent -3.42,-1.4 2.65,1.4, body extent -2.86,-1.4 2.86,1.4, height 2.29
FH12-10S-0.5SH [mm] "FFC/FPC Connector 10 Circuits"
  rect 1.8x2.2 smd mask+0.051: 0(-4.15,-3.35) 0(4.15,-3.35)
  rect 0.25x1.5 smd mask+0.051: 1(-2.25,0) 2(-1.75,0) 3(-1.25,0) 4(-0.75,0) 5(-0.25,0) 6(0.25,0) 7(0.75,0) 8(1.25,0) 9(1.75,0) 10(2.25,0)
  silkscreen extent -5.35,-6.95 5.35,1.02, body extent -4.55,-6.35 4.55,0.05, height 2.14
FH12-20S-0.5SVA [mm] "FPC CONN. 0.5MM PITCH, 20P, Vertical"
  rrect20% 0.8x1.8 smd mask+0.05: 0(-5.75,-1.5) 0(-5.75,1.5) 0(5.75,-1.5) 0(5.75,1.5)
  rect 0.4x1.5 smd mask+0.05: 1(4.75,1.5) 2(4.25,-1.5) 3(3.75,1.5) 4(3.25,-1.5) 5(2.75,1.5) 6(2.25,-1.5) 7(1.75,1.5) 8(1.25,-1.5) 9(0.75,1.5) 10(0.25,-1.5) 11(-0.25,1.5) 12(-0.75,-1.5) 13(-1.25,1.5) 14(-1.75,-1.5) 15(-2.25,1.5) 16(-2.75,-1.5) 17(-3.25,1.5) 18(-3.75,-1.5) 19(-4.25,1.5) 20(-4.75,-1.5)
  silkscreen extent -6.9,-2.7 6.9,2.8, body extent -6.7,-1.9 6.7,1.9, height 5.5
HDR1X6 [mm]
  rect 1.5x1.5 hole 0.92: 1(0,0)
  round 1.5 hole 0.92: 2(2.54,0) 3(5.08,0) 4(7.62,0) 5(10.16,0) 6(12.7,0)
  silkscreen extent -1.27,-1.27 13.97,1.27, body extent -1.25,-1.22 13.89,1.28, height 8.2
IDC2-14MS [mm]
  rrect50% 1.6x1.6 hole 0.9: 1(0,0)
  round 1.6 hole 0.9: 2(2,0) 3(0,-2) 4(2,-2) 5(0,-4) 6(2,-4) 7(0,-6) 8(2,-6) 9(0,-8) 10(2,-8) 11(0,-10) 12(2,-10) 13(0,-12) 14(2,-12)
  silkscreen extent -4.2,-18.4 4.9,6.4, body extent -2.2,-17.98 4.51,5.98, height 5
INDC1608X05L [mm] "Chip Inductor, 2-Leads, Body 1,60x0,80mm, IPC High Density"
  rect 0.7x0.84 smd: 1(-0.68,0) 2(0.68,0)
  body extent -0.8,-0.4 0.8,0.4, height 0.5
INDC1812PS [mm] "Chip Inductor, 2-Leads, Body 5,87x4,98mm, IPC High Density"
  rect 1.14x3.05 smd: 1(-2.07,0) 2(2.07,0)
  silkscreen extent -1.35,-2.41 1.35,2.41, body extent -2.93,-2.49 2.93,2.49, height 3.8
INDCXGL4020 [mm]
  rect 0.98x3.4 smd: 1(-1.185,0) 2(1.185,0)
  silkscreen extent -0.55,-1.92 0.55,1.92, body extent -2.15,-2.15 2.15,2.15, height 2
KLS1-SATA001 [mm]
  rect 0.8x2.2 smd mask+0.05: 1(-3.81,0) 2(-2.54,0) 3(-1.27,0) 4(0,0) 5(1.27,0) 6(2.54,0) 7(3.81,0)
  round 3 hole 1.8: 4(-6.37,-2.6) 4(6.37,-2.6)
  silkscreen extent -9.43,-11.02 8.35,1.12, body extent -9.27,-10.96 8.27,0.61, height 5.82
"PLS-3 (DS1021-1x3)" [mm]
  rect 2x2 hole 1.02: 1(0,0)
  round 2 hole 1.02: 2(0,-2.54) 3(0,-5.08)
  silkscreen extent -1.8,-6.9 1.8,1.7, body extent -1.24,-6.35 1.3,1.27, height 7.81
PQFN40P600X300X80_HS-33N [mm] "PQFN, 32-Leads, Body 6,00x3,00mm, Pitch 0,40mm, Thermal Pad 1,50x1,50mm, IPC Medium Density"
  rrect50% 0.5x0.2 smd mask+0.05: 1(-2.95,0.8) 2(-2.95,0.4) 3(-2.95,0) 4(-2.95,-0.4) 5(-2.95,-0.8) 17(2.95,-0.8) 18(2.95,-0.4) 19(2.95,0) 20(2.95,0.4) 21(2.95,0.8)
  rrect50% 0.2x0.5 smd mask+0.05: 6(-2,-1.45) 7(-1.6,-1.45) 8(-1.2,-1.45) 9(-0.8,-1.45) 10(-0.4,-1.45) 11(0,-1.45) 12(0.4,-1.45) 13(0.8,-1.45) 14(1.2,-1.45) 15(1.6,-1.45) 16(2,-1.45) 22(2,1.45) 23(1.6,1.45) 24(1.2,1.45) 25(0.8,1.45) 26(0.4,1.45) 27(0,1.45) 28(-0.4,1.45) 29(-0.8,1.45) 30(-1.2,1.45) 31(-1.6,1.45) 32(-2,1.45)
  rect 4.95x1.8 smd: 33(0,0)
  silkscreen extent -3.82,-1.55 3.05,1.55, body extent -3.05,-1.55 3.05,1.55, height 0.8
RESC1005X04L [mm] "Chip Resistor, 2-Leads, Body 1,00x0,50mm, IPC High Density"
  rect 0.35x0.45 smd: 1(-0.45,0) 2(0.45,0)
  body extent -0.5,-0.25 0.5,0.25, height 0.35
SON40P300X80_HS-15L [mm] "SON, 14-Leads, Body 3.00x3.00mm, Pitch 0.40mm, Thermal Pad 2.30x1.69mm, IPC High Density"
  rect 0.7x0.2 smd mask+0.075: 1(-1.395,1.2) 2(-1.395,0.8) 3(-1.395,0.4) 4(-1.395,0) 5(-1.395,-0.4) 6(-1.395,-0.8) 7(-1.395,-1.2) 8(1.395,-1.2) 9(1.395,-0.8) 10(1.395,-0.4) 11(1.395,0) 12(1.395,0.4) 13(1.395,0.8) 14(1.395,1.2)
  rect 1.69x2.3 smd mask+0.075: 15(0,0)
  silkscreen extent -2,-1.7 1.55,1.75, body extent -1.5,-1.5 1.5,1.5, height 0.73
SON50P160X65_HS-9N [mm] "SON, 8-Leads, Body 2,10x1,60mm, Pitch 0,50mm, Thermal Pad 1,68x0,33mm, IPC Medium Density"
  rect 0.63x0.25 smd mask+0.05: 1(-0.765,0.75) 2(-0.765,0.25) 3(-0.765,-0.25) 4(-0.765,-0.75) 5(0.765,-0.75) 6(0.765,-0.25) 7(0.765,0.25) 8(0.765,0.75)
  rect 0.33x1.68 smd mask+0.05: 9(0,0)
  silkscreen extent -1.3,-1.25 0.85,1.3, body extent -0.85,-1.1 0.85,1.1, height 0.65
SON127P800X70_HS-9N [mm] "SON, 8-Leads, Body 6,00x8,00mm, Pitch 1,27mm, Thermal Pad 4,30x3,40mm, IPC Medium Density"
  rect 0.95x0.45 smd: 1(-3.87,1.905) 2(-3.87,0.635) 3(-3.87,-0.635) 4(-3.87,-1.905) 5(3.87,-1.905) 6(3.87,-0.635) 7(3.87,0.635) 8(3.87,1.905)
  rect 3.4x4.3 smd paste-1.7: 9(0,0)
  silkscreen extent -4.65,-3.2 4.2,3.25, body extent -4.05,-3.05 4.05,3.05, height 0.7
SOT95P240X120-3L [mm] "SOT23, 3-Leads, Body 2,90x2,40mm, Pitch 0,95mm, IPC High Density"
  rect 0.75x0.6 smd: 1(1.075,0) 2(-1.075,0.95) 3(-1.075,-0.95)
  silkscreen extent -0.3,-1.5 1.47,1.5, body extent -1.25,-1.5 1.25,1.5, height 1.2